# Altium PCB FPW1-0-2.PcbDoc (part 1 of 11)
Units mm, origin at the board's own origin, x right, y up, seen from the top; angles counter-clockwise.
Board outline 85 x 56 mm, 4 copper layers (Top Layer, GND_Plane, 3V3_Plane, Bottom Layer); 182 components, 321 nets, 1106 pads, 360 vias.
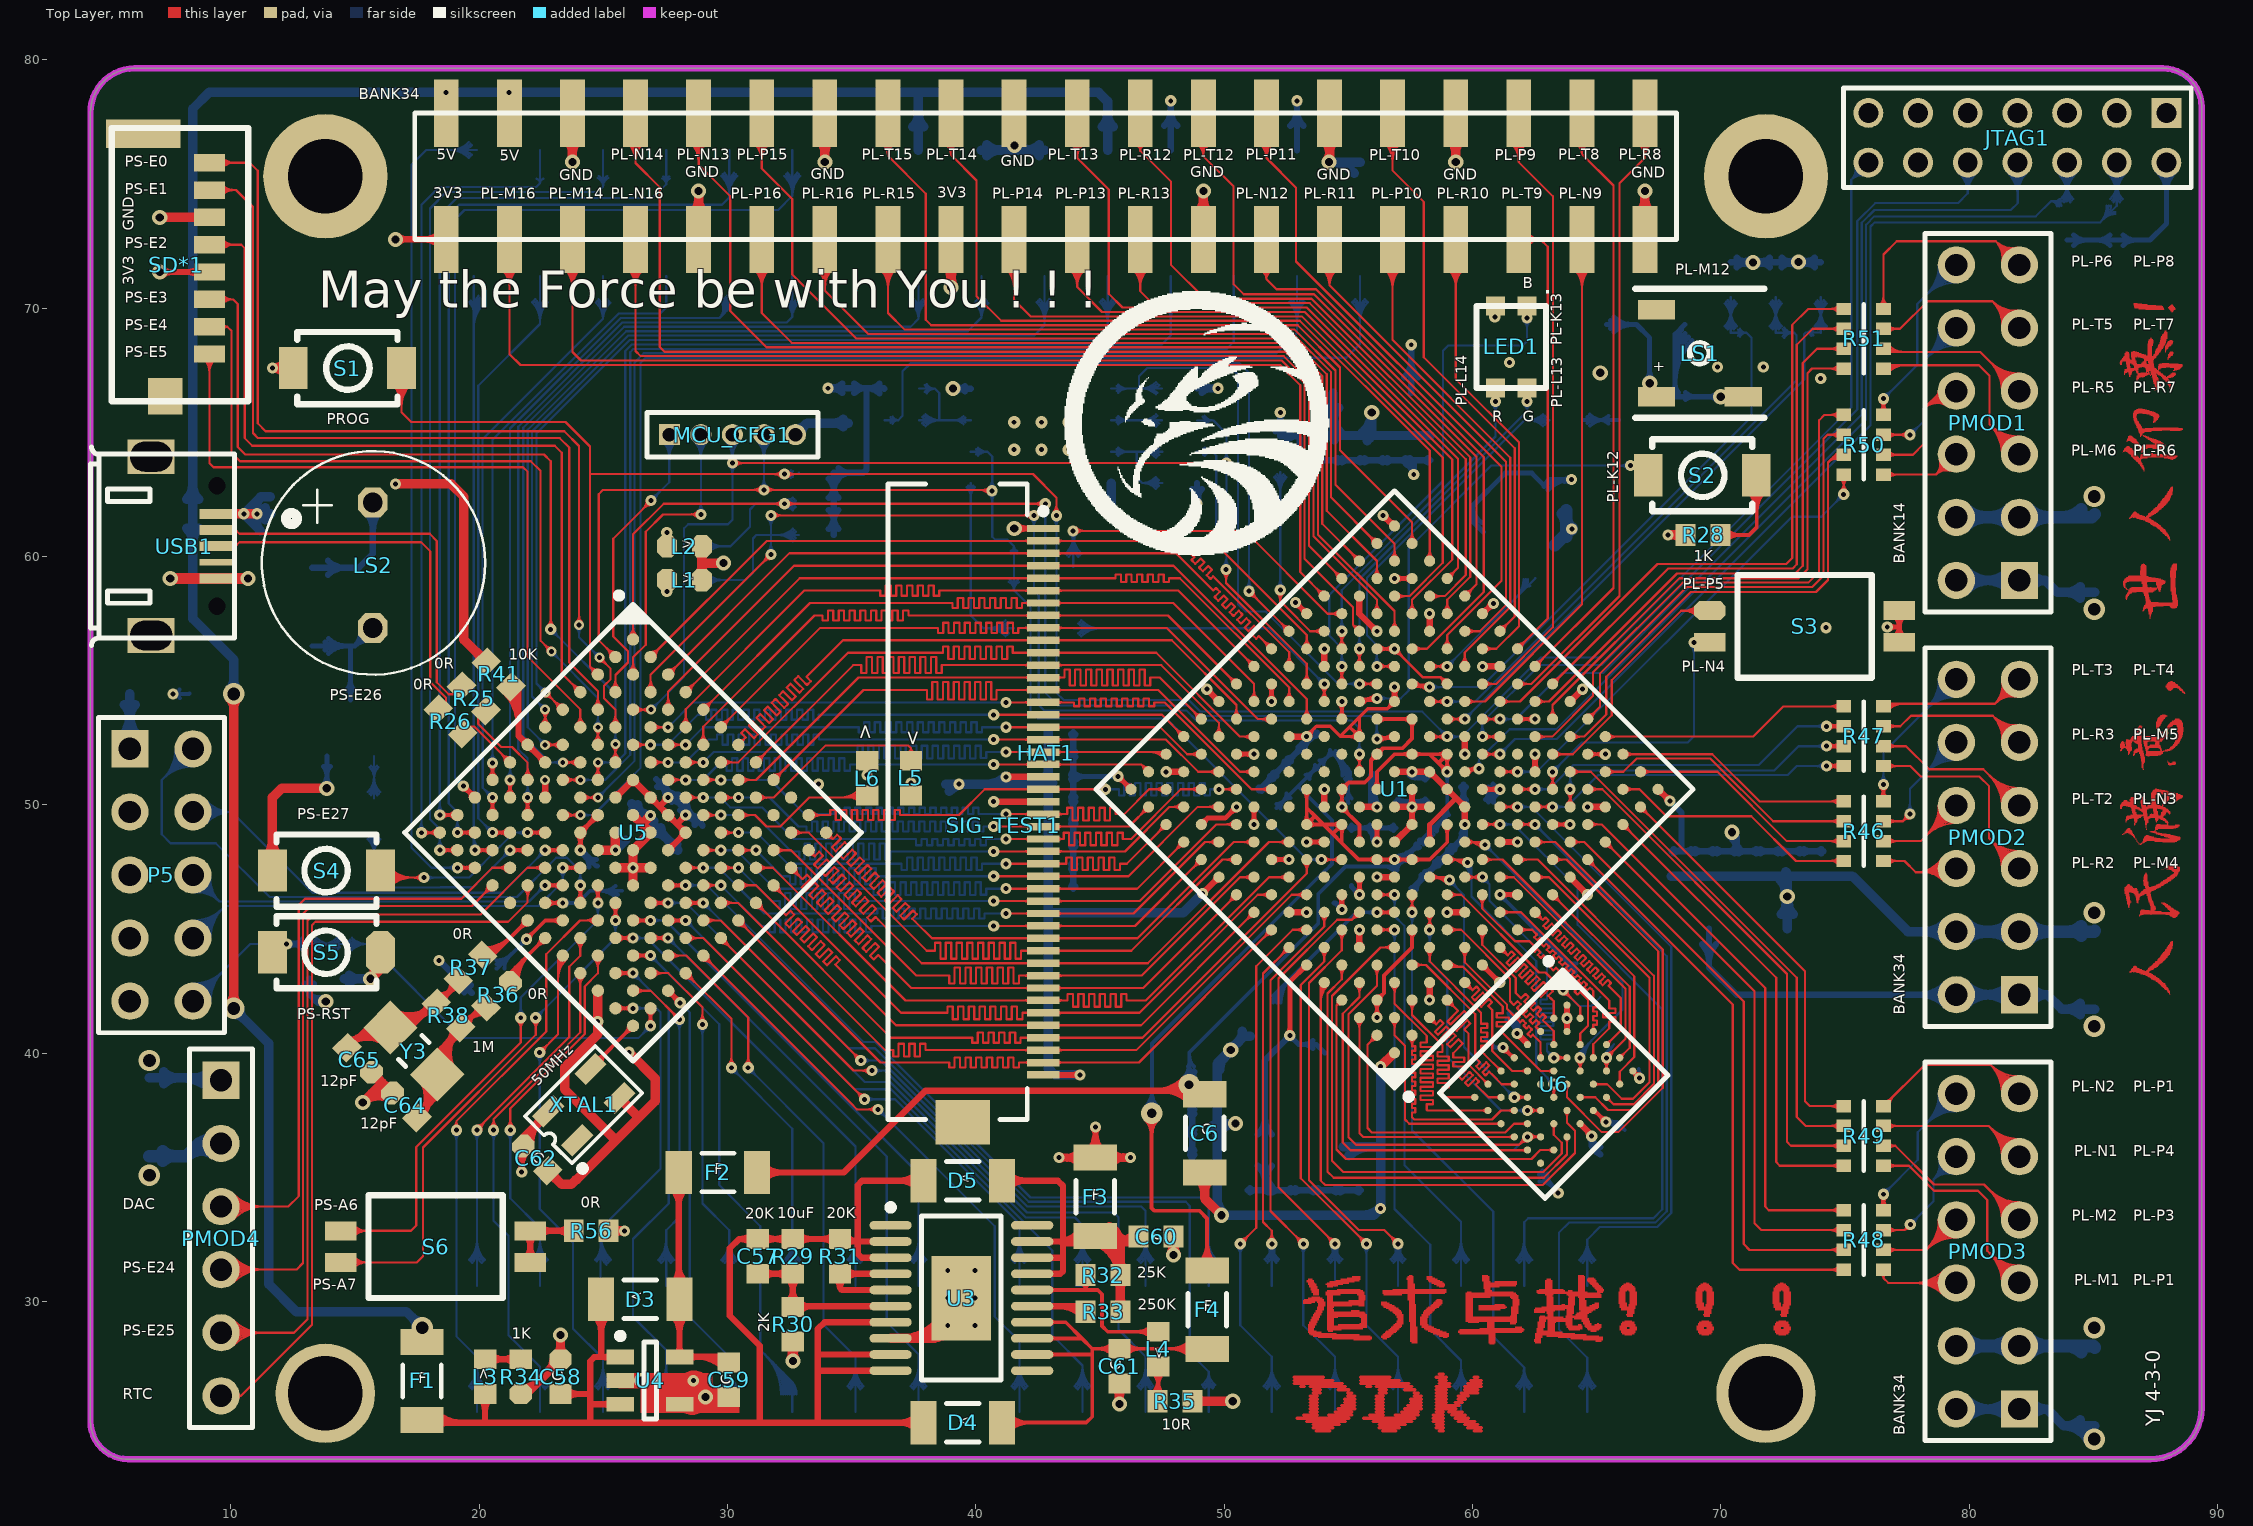
[diagram p0: Top Layer view]
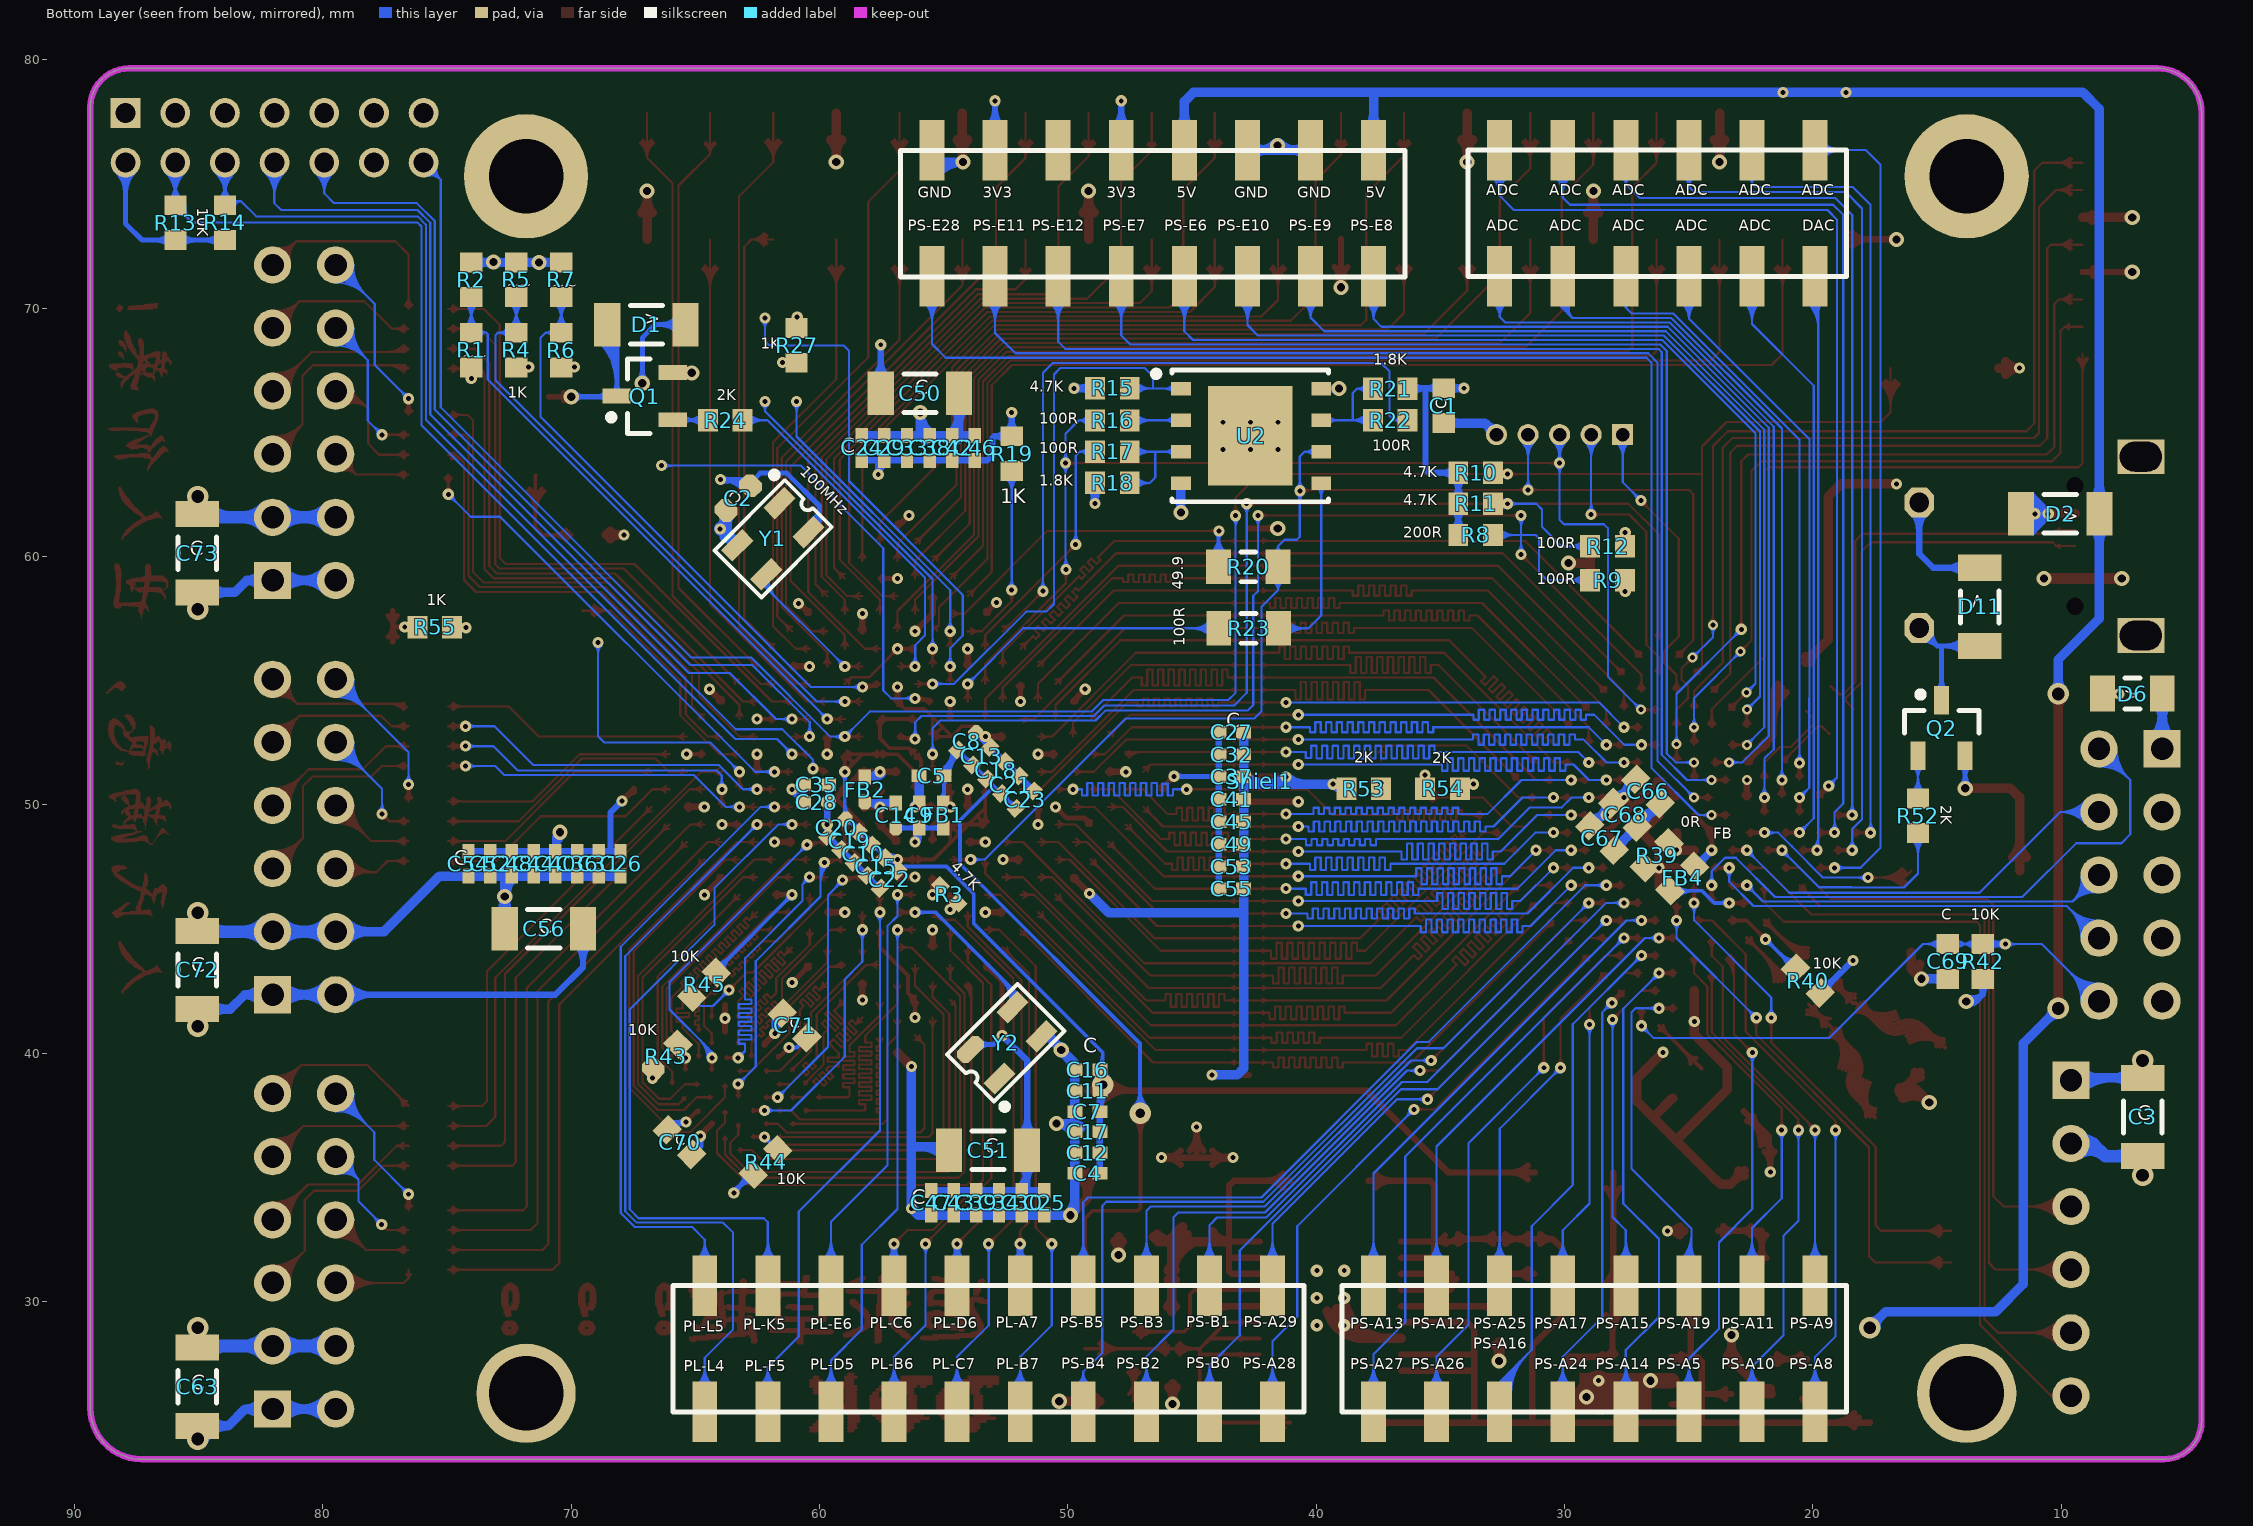
[diagram p1: Bottom Layer view, seen from below]
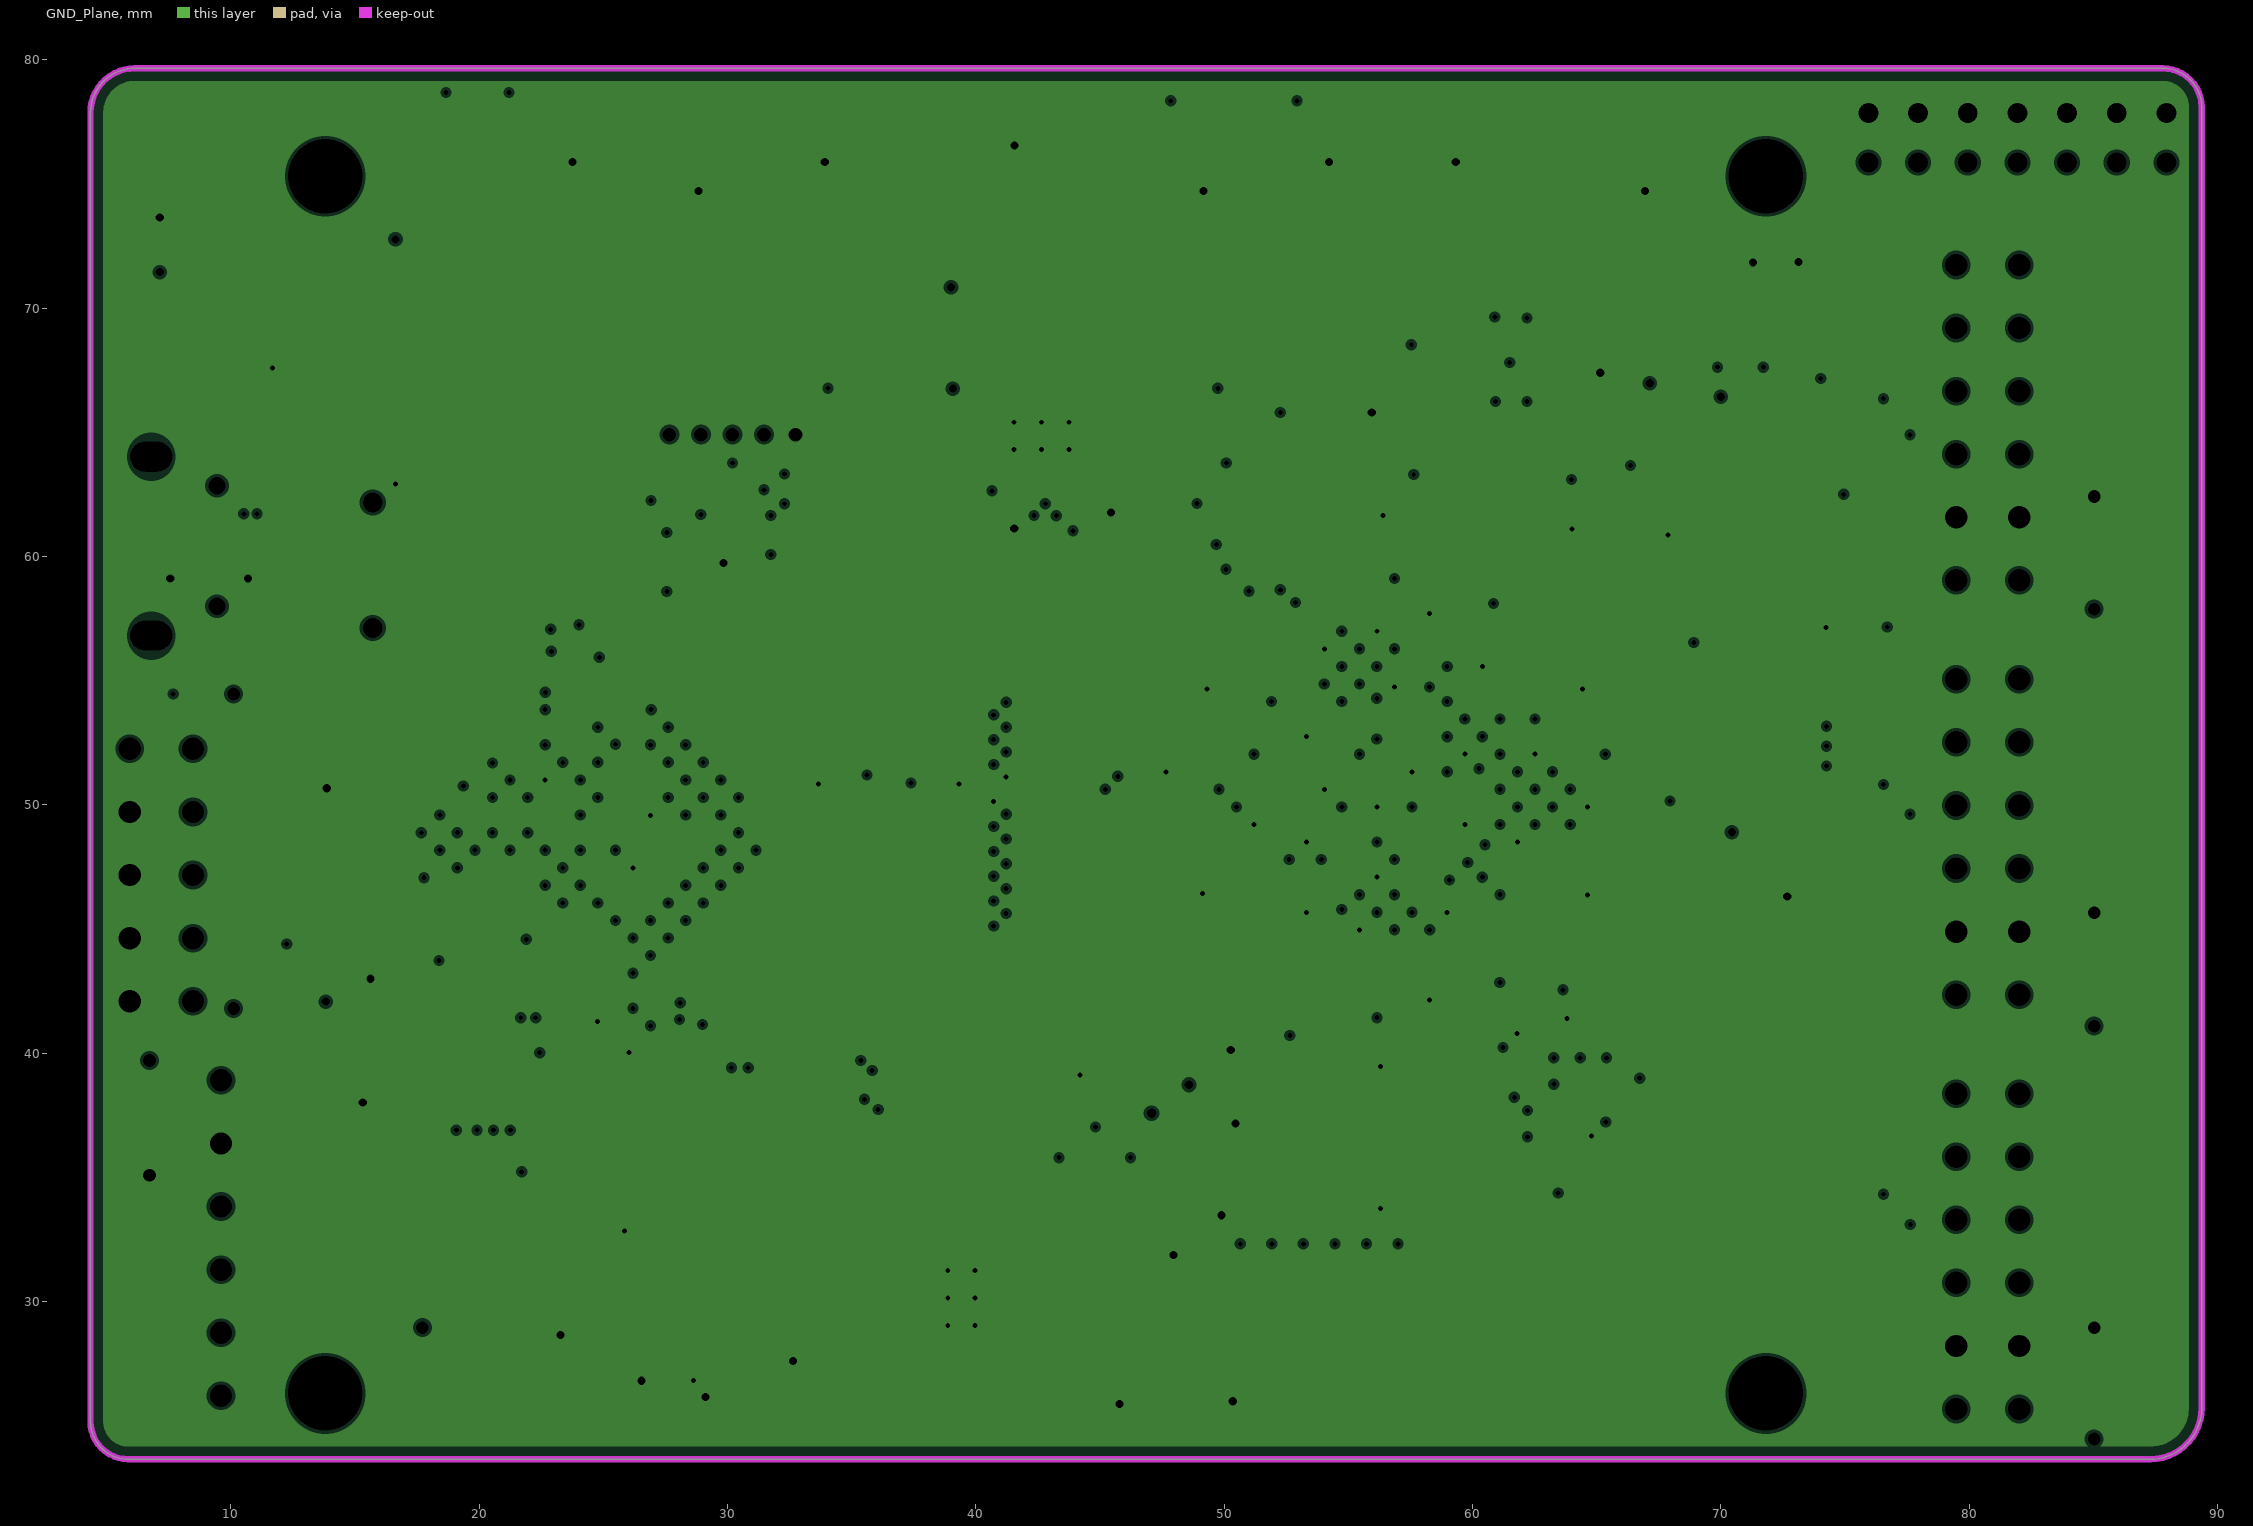
[diagram p2: GND_Plane, clearances drawn from the general rule]
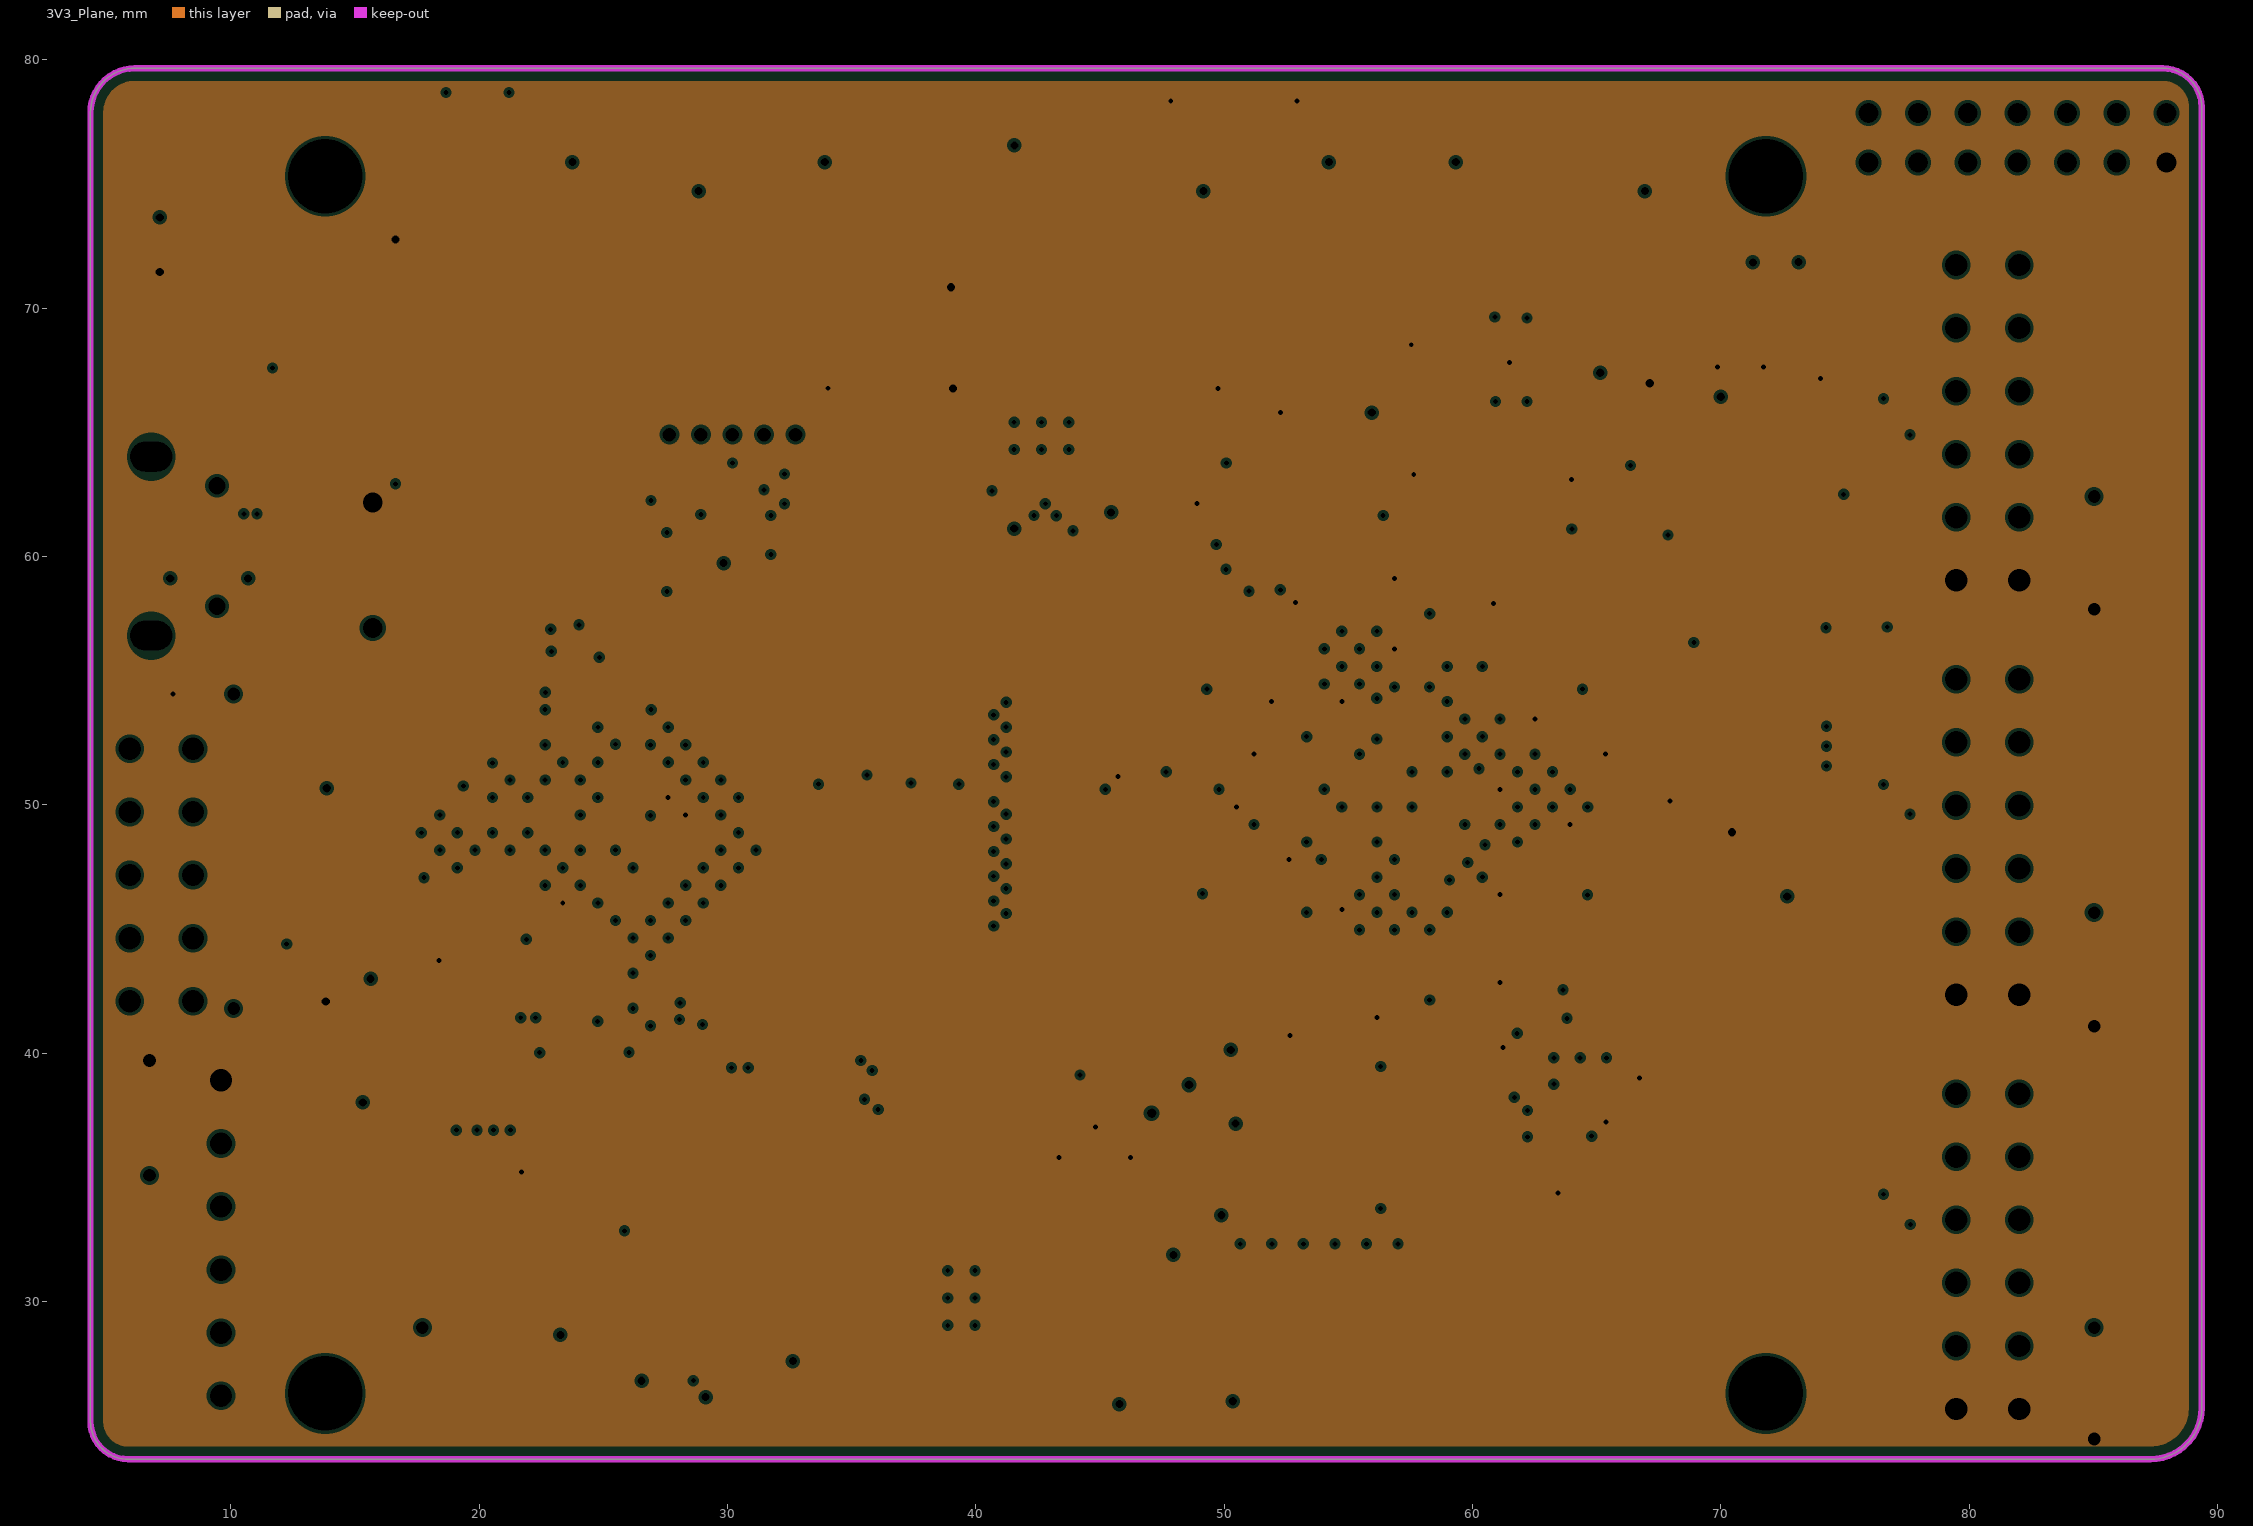
[diagram p3: 3V3_Plane, clearances drawn from the general rule]

## Layer stack, top to bottom
Top Layer: signal copper 0.0356
Dielectric: core 0.32, FR-4, Dk 4.8
GND_Plane: plane copper 0.0356, net GND
Dielectric: prepreg 0.32, FR-4, Dk 4.8
3V3_Plane: plane copper 0.0356, net 3V3
Dielectric: core 0.32, FR-4, Dk 4.8
Bottom Layer: signal copper 0.0356

## Board outline
4.356,25.184 ccw(c5.88,25.184) 5.88,23.66 87.287,23.66 ccw(c87.287,25.729) 89.356,25.729 89.356,78.093 ccw(c87.789,78.093) 87.789,79.66 6.14,79.66 ccw(c6.14,77.876) 4.356,77.876

## Design rules (kind name [scope] priority, off if disabled: settings)
Clearance VIA2ALL [(IsPad OR IsVia)] p1: gap=0.127
Clearance ALL2ALL [All] p2: gap=0.089
ComponentClearance [All] p1 off: gap=0.254 collisioncheckmode=3 verticalgap=0.254 showdistances=FALSE
DiffPairsRouting [All] p1: maxlimit=0.254 minlimit=0.254 mostfreqgap=0.254 maxuncoupledlength=12.7
PlaneClearance [All] p1: clearance=0.127
PlaneConnect [All] p1: planeconnectstyle=Direct reliefexpansion=0.508 reliefentries=4 reliefconductorwidth=0.254 reliefairgap=0.254
PolygonConnect [All] p1: connectstyle=Direct reliefconductorwidth=0.254 reliefentries=4 polygonreliefangle="90 Angle" airgapwidth=0.254
RoutingVias [All] p1: holewidth=0.711 width=1.27 viastyle="Through Hole" minholewidth=0.711 minwidth=1.27 maxholewidth=0.711 maxwidth=1.27
SolderMaskExpansion [All] p1: expansion=0.051
Width [All] p1: maxlimit=1.27 minlimit=0.089 preferedwidth=0.254 minimp=50.000000 maximp=50.000000 favimp=50.000000
24 further rules are at their usual default settings.

## Classes and differential pairs
net class PTE[5..0]: PTE0 PTE1 PTE2 PTE3 PTE4 PTE5 PTE6 PTE7 PTE8 PTE9 PTE10 PTE11 PTE12 PTE24 PTE25 PTE26 PTE27 PTE28
component class FPGA_CFG: JTAG1 L1 L2 MCU_CFG1 R1 R2 R3 R4 R5 R6 R7 R8 R9 R10 R11 R12 R13 R14 S1 U1
component class FPGA_IO: C1 C2 R15 R16 R17 R18 R19 R20 R21 R22 R23 U2 Y1 Y2
component class FPGA_Power: C4 C5 C6 C7 C8 C9 C10 C11 C12 C13 C14 C15 C16 C17 C18 C19 C20 C21 C22 C23 C24 C25 C26 C27 C28 C29 C30 C31 C32 C33 C34 C35 C36 C37 C38 C39 C40 C41 C42 C43 C44 C45 C46 C47 C48 C49 C50 C51 C52 C53 C54 C55 C56 FB1 FB2
component class IO: C3 C63 C72 C73 D1 D2 D11 F1 HAT1 L5 L6 LED1 LS1 LS2 PMOD1 PMOD2 PMOD3 PMOD4 Q1 Q2 R24 R25 R26 R27 R28 R46 R47 R48 R49 R50 R51 R52 R53 R54 R55 R56 S2 S3 S4 S6 SD*1 Shiel1 USB1
component class MCU: C62 C64 C65 C66 C67 C68 C69 D6 FB4 P5 R36 R37 R38 R39 R40 R41 R42 S5 SIG_TEST1 U5 XTAL1 Y3
component class MEMORY: C70 C71 R43 R44 R45 U6
component class Power: C57 C58 C59 C60 C61 D3 D4 D5 F2 F3 F4 L3 L4 R29 R30 R31 R32 R33 R34 R35 U3 U4
net class BANK14_IO[42..1]: BANK14_IO1 BANK14_IO2 BANK14_IO3 BANK14_IO4 BANK14_IO5 BANK14_IO6 BANK14_IO7 BANK14_IO8 BANK14_IO9 BANK14_IO10 BANK14_IO11 BANK14_IO12 BANK14_IO13 BANK14_IO14 BANK14_IO15 BANK14_IO16 BANK14_IO17 BANK14_IO18 BANK14_IO19 BANK14_IO20 BANK14_IO21 BANK14_IO22 BANK14_IO23 BANK14_IO24 BANK14_IO25 BANK14_IO26 BANK14_IO27 BANK14_IO28 BANK14_IO29 BANK14_IO30 BANK14_IO31 BANK14_IO32 BANK14_IO33 BANK14_IO34 BANK14_IO35 BANK14_IO36 BANK14_IO37 BANK14_IO38 BANK14_IO39 BANK14_IO40 BANK14_IO41 BANK14_IO42
net class BANK15_IO[9..1]: BANK15_IO1 BANK15_IO2 BANK15_IO3 BANK15_IO4 BANK15_IO5 BANK15_IO6 BANK15_IO7 BANK15_IO8 BANK15_IO9
net class FB_AD[31..0]: FB_AD0 FB_AD1 FB_AD2 FB_AD3 FB_AD4 FB_AD5 FB_AD6 FB_AD7 FB_AD8 FB_AD9 FB_AD10 FB_AD11 FB_AD12 FB_AD13 FB_AD14 FB_AD15 FB_AD16 FB_AD17 FB_AD18 FB_AD19 FB_AD20 FB_AD21 FB_AD22 FB_AD23 FB_AD24 FB_AD25 FB_AD26 FB_AD27 FB_AD28 FB_AD29 FB_AD30 FB_AD31
net class SRAM-A[19..0]: SRAM-A0 SRAM-A1 SRAM-A2 SRAM-A3 SRAM-A4 SRAM-A5 SRAM-A6 SRAM-A7 SRAM-A8 SRAM-A9 SRAM-A10 SRAM-A11 SRAM-A12 SRAM-A13 SRAM-A14 SRAM-A15 SRAM-A16 SRAM-A17 SRAM-A18 SRAM-A19
net class SRAM-DQ[15..0]: SRAM-DQ0 SRAM-DQ1 SRAM-DQ2 SRAM-DQ3 SRAM-DQ4 SRAM-DQ5 SRAM-DQ6 SRAM-DQ7 SRAM-DQ8 SRAM-DQ9 SRAM-DQ10 SRAM-DQ11 SRAM-DQ12 SRAM-DQ13 SRAM-DQ14 SRAM-DQ15
net class ANALOG[13..0]: ANALOG0 ANALOG1 ANALOG2 ANALOG3 ANALOG4 ANALOG5 ANALOG6 ANALOG7 ANALOG8 ANALOG9 ANALOG10 ANALOG11 ANALOG12 ANALOG13
differential pair USB0: +USB0_P -USB0_N
differential pair USB0D: +USB0D_P -USB0D_N

## Components (designator, comment, footprint, x,y, rotation, side; value= is the part's Value field where it differs from the comment)
C1 "Cap" 1608[0603]#1 34.861,66.078 r270 bottom
C2 "Cap" 1608[0603]#2 63.271,62.357 r135 bottom
C3 "Cap" 1206 6.718,37.44 r270 bottom
C4 "Cap" 0402#1 49.212,35.166 r0 bottom
C5 "Cap" 0402#1 55.486,51.181 r0 bottom
C6 "Cap" 1206 49.212,36.779 r270 top
C7 "Cap" 0402#1 49.212,37.655 r0 bottom
C8 "Cap" 0402#2 54.077,52.565 r135 bottom
C9 "Cap" 0402#1 55.982,49.581 r270 bottom
C10 "Cap" 0402#1 58.26,48.043 r315 bottom
C11 "Cap" 0402#1 49.212,38.501 r0 bottom
C12 "Cap" 0402#1 49.212,36.005 r0 bottom
C13 "Cap" 0402#1 53.48,51.968 r135 bottom
C14 "Cap" 0402#3 56.921,49.581 r90 bottom
C15 "Cap" 0402#1 57.729,47.522 r315 bottom
C16 "Cap" 0402#1 49.212,39.346 r0 bottom
C17 "Cap" 0402#1 49.212,36.843 r0 bottom
C18 "Cap" 0402#1 52.908,51.397 r135 bottom
C19 "Cap" 0402#1 58.791,48.564 r315 bottom
C20 "Cap" 0402#3 59.322,49.085 r315 bottom
C21 "Cap" 0402#1 52.324,50.813 r135 bottom
C22 "Cap" 0402#1 57.199,47.001 r315 bottom
C23 "Cap" 0402#1 51.74,50.216 r135 bottom
C24 "Cap" 0402#1 58.293,64.376 r90 bottom
C25 "Cap" 0402#1 50.952,33.985 r270 bottom
C26 "Cap" 0402#1 68.008,47.638 r270 bottom
C27 "Cap" 0402#1 43.421,52.934 r180 bottom
C28 "Cap" 0402#3 60.134,50.114 r0 bottom
C29 "Cap" 0402#1 57.384,64.376 r90 bottom
C30 "Cap" 0402#1 51.862,33.985 r270 bottom
C31 "Cap" 0402#1 68.883,47.638 r270 bottom
C32 "Cap" 0402#1 43.421,52.032 r180 bottom
C33 "Cap" 0402#1 56.474,64.376 r90 bottom
C34 "Cap" 0402#1 52.771,33.985 r270 bottom
C35 "Cap" 0402#1 60.134,50.813 r0 bottom
C36 "Cap" 0402#1 69.757,47.638 r270 bottom
C37 "Cap" 0402#1 43.421,51.13 r180 bottom
C38 "Cap" 0402#1 55.565,64.376 r90 bottom
C39 "Cap" 0402#1 53.68,33.985 r270 bottom
C40 "Cap" 0402#1 70.632,47.638 r270 bottom
C41 "Cap" 0402#1 43.421,50.228 r180 bottom
C42 "Cap" 0402#1 54.656,64.376 r90 bottom
C43 "Cap" 0402#1 54.59,33.985 r270 bottom
C44 "Cap" 0402#1 71.506,47.638 r270 bottom
C45 "Cap" 0402#1 43.421,49.327 r180 bottom
C46 "Cap" 0402#1 53.746,64.376 r90 bottom
C47 "Cap" 0402#1 55.499,33.985 r270 bottom
C48 "Cap" 0402#1 72.381,47.638 r270 bottom
C49 "Cap" 0402#1 43.421,48.425 r180 bottom
C50 "Cap" 1206 55.956,66.586 r180 bottom
C51 "Cap" 1206 53.213,36.106 r0 bottom
C52 "Cap" 0402#1 73.255,47.638 r270 bottom
C53 "Cap" 0402#1 43.421,47.523 r180 bottom
C54 "Cap" 0402#1 74.13,47.638 r270 bottom
C55 "Cap" 0402#1 43.421,46.622 r180 bottom
C56 "Cap" 1206 71.095,45.021 r0 bottom
C57 "Cap" 1608[0603]#1 31.217,31.826 r270 top
C58 "Cap" 1608[0603]#3 23.279,26.988 r270 top
C59 "Cap" 1608[0603]#1 30.048,26.86 r270 top
C60 "Cap" 1608[0603]#1 47.257,32.626 r0 top
C61 "Cap" 1608[0603]#1 45.783,27.407 r270 top
C62 "Cap" 1608[0603]#4 22.276,35.776 r135 top
C63 "Cap" 1206 85.052,26.581 r90 bottom
C64 "Cap" 1608[0603]#3 17.005,37.91 r315 top
C65 "Cap" 1608[0603]#3 15.176,39.738 r135 top
C66 "Cap" 1608[0603]#1 26.645,50.546 r45 bottom
C67 "Cap" 1608[0603]#1 28.499,48.666 r45 bottom
C68 "Cap" 1608[0603]#1 27.572,49.606 r45 bottom
C69 "Cap" 1608[0603]#1 14.58,43.701 r90 bottom
C70 "Cap" 1608[0603]#1 65.634,36.424 r45 bottom
C71 "Cap" 1608[0603]#1 60.998,41.123 r225 bottom
C72 "Cap" 1206 85.052,43.358 r90 bottom
C73 "Cap" 1206 85.052,60.134 r90 bottom
D1 "SK34" 1206 66.967,69.342 r180 bottom
D2 "SK34" 1206 10.046,61.722 r180 bottom
D3 "SK34" 1206 26.492,30.099 r180 top
D4 "SK34" 1206 39.472,25.133 r180 top
D5 "SK34" 1206 39.472,34.874 r180 top
D6 "SK34" C2012 7.137,54.483 r180 bottom
D11 "SK34" 1206 13.284,57.975 r90 bottom
F1 "Fuse 1" 1206 17.704,26.81 r90 top
F2 "Fuse 1" 1206 29.616,35.204 r180 top
F3 "Fuse 1" 1206 44.818,34.227 r270 top
F4 "Fuse 1" 1206 49.314,29.68 r270 top
FB1 "Inductor" 0402#1 55.016,49.581 r270 bottom
FB2 "Inductor" 0402#2 58.179,50.622 r270 bottom
FB4 "Inductor" 1608[0603]#1 25.26,47.041 r135 bottom
HAT1 "respberry-HAT" SMT-HAT 42.812,75.311 r0 top locked
JTAG1 "MHDR2X7" "Hearder2 7X2" 87.935,77.864 r270 top
L1 "LED" 1608[0603]#2 28.27,59.055 r0 top
L2 "LED" 1608[0603]#2 28.27,60.414 r0 top
L3 "LED" 1608[0603]#1 20.244,26.987 r90 top
L4 "LED" 1608[0603]#1 47.346,28.092 r270 top
L5 "LED" 1608[0603]#1 37.389,51.079 r270 top
L6 "LED" 1608[0603]#1 35.623,51.079 r90 top
LED1 "RGB_LED1206" RGB 61.557,68.44 r270 top
LS1 "Bell" "MLT-5020 BZ" 69.151,68.186 r0 top
LS2 "Bell" BZ 15.723,59.753 r0 top locked
MCU_CFG1 "Header 5" MHDR1X5 27.661,64.91 r0 top
P5 "JTAG" HDR2X5 5.944,52.261 r270 top
PMOD1 "Header 6X2" HDR2X6 82.017,59.042 r90 top
PMOD2 "Header 6X2" HDR2X6 82.017,42.361 r90 top
PMOD3 "Header 6X2" HDR2X6 82.017,25.679 r90 top
PMOD4 "Header 6" HDR1X6 9.614,38.913 r270 top
Q1 "QNPN" SOT23_N 67.031,66.459 r0 bottom
Q2 "QNPN" SOT23_N 14.821,53.099 r90 bottom
R1 "Res" 1608[0603]#1 74.016,68.313 r270 bottom
R2 "不贴" 1608[0603]#1 74.016,71.145 r270 bottom
R3 "Res" 0402#1 54.775,46.406 r45 bottom
R4 "不贴" 1608[0603]#1 72.206,68.313 r270 bottom
R5 "Res" 1608[0603]#1 72.206,71.145 r270 bottom
R6 "不贴" 1608[0603]#1 70.396,68.313 r270 bottom
R7 "Res" 1608[0603]#1 70.396,71.145 r270 bottom
R8 "Res" 1608[0603]#1 33.579,60.871 r0 bottom
R9 "Res" 1608[0603]#1 28.27,59.055 r0 bottom
R10 "Res" 1608[0603]#1 33.579,63.373 r0 bottom
R11 "Res" 1608[0603]#1 33.579,62.122 r0 bottom
R12 "Res" 1608[0603]#1 28.27,60.414 r0 bottom
R13 "Res" 1608[0603]#1 85.928,73.444 r270 bottom
R14 "Res" 1608[0603]#1 83.934,73.444 r270 bottom
R15 "Res" 1608[0603]#1 48.209,66.777 r180 bottom
R16 "Res" 1608[0603]#1 48.209,65.481 r0 bottom
R17 "Res" 1608[0603]#1 48.209,64.224 r0 bottom
R18 "Res" 1608[0603]#1 48.209,62.967 r180 bottom
R19 "Res" 1608[0603]#1 52.261,64.148 r270 bottom
R20 "Res" R2012 42.735,59.588 r0 bottom
R21 "Res" 1608[0603]#1 37.019,66.764 r0 bottom
R22 "Res" 1608[0603]#1 37.019,65.494 r0 bottom
R23 "Res" R2012 42.723,57.112 r180 bottom
R24 "Res2" 1608[0603]#1 63.792,65.494 r180 bottom
R25 "Res" 1608[0603]#1 19.787,54.292 r315 top
R26 "Res" 1608[0603]#1 18.847,53.365 r315 top
R27 "Res" 1608[0603]#1 60.922,68.504 r270 bottom
R28 "Res" 1608[0603]#1 69.278,60.871 r0 top
R29 "Res" 1608[0603]#1 32.635,31.826 r270 top
R30 "Res" 1608[0603]#1 32.635,29.096 r270 top
R31 "Res" 1608[0603]#1 34.531,31.826 r90 top
R32 "Res" 1608[0603]#1 45.119,31.077 r180 top
R33 "Res" 1608[0603]#1 45.123,29.604 r180 top
R34 "Res" 1608[0603]#3 21.679,26.987 r90 top
R35 "Res" 1608[0603]#1 48.019,25.997 r180 top
R36 "Res" 1608[0603]#4 20.777,42.367 r45 top
R37 "Res" 1608[0603]#1 19.66,43.459 r45 top
R38 "Res" 1608[0603]#1 18.771,41.529 r135 top
R39 "Res" 1608[0603]#1 26.289,47.981 r135 bottom
R40 "Res" 1608[0603]#1 20.206,42.926 r45 bottom
R41 "Res" 1608[0603]#1 20.79,55.258 r315 top
R42 "Res" 1608[0603]#1 13.157,43.701 r90 bottom
R43 "Res" 1608[0603]#4 66.192,39.878 r315 bottom
R44 "Res" 1608[0603]#1 62.166,35.623 r315 bottom
R45 "Res" 1608[0603]#1 64.643,42.761 r135 bottom
R46 "res*4" 0603*4 75.743,48.946 r90 top
R47 "res*4" 0603*4 75.743,52.768 r90 top
R48 "res*4" 0603*4 75.743,32.487 r90 top
R49 "res*4" 0603*4 75.743,36.678 r90 top
R50 "res*4" 0603*4 75.743,64.503 r90 top
R51 "res*4" 0603*4 75.743,68.77 r90 top
R52 "Res2" 1608[0603]#1 15.773,49.568 r270 bottom
R53 "Res" 1608[0603]#1 38.087,50.648 r180 bottom
R54 "Res" 1608[0603]#1 34.912,50.648 r0 bottom
R55 "Res" 1608[0603]#1 75.489,57.15 r0 bottom
R56 "Res" 1608[0603]#1 24.511,32.855 r180 top
S1 "SW-PB" "key 3*4*2"#1 14.719,67.589 r0 top
S2 "SW-PB" "key 3*4*2"#1 69.266,63.271 r0 top
S3 "SW DIP-2" sw*2#1 73.368,57.188 r0 top
S4 "SW-PB" "key 3*4*2"#1 13.843,47.358 r180 top
S5 "SW-PB" "key 3*4*2"#2 13.843,44.069 r180 top
S6 "SW DIP-2" sw*2#2 18.25,32.22 r0 top locked
SD*1 "TF_card" TF卡座(短体) 5.207,77.254 r270 top locked
Shiel1 "Arduino-Shield" SMT-B-Shield 39.726,28.105 r0 top locked
SIG_TEST1 "Header 24X2" FFC/SM0.5-2H45 41.096,50.131 r270 top locked
U1 "XC7A35T-1FTG256" BGA100P9X9-81A 56.858,50.63 r135 top locked
U2 "N25Q032A" QFN127P500X600X100_HS-9N 42.647,64.859 r180 bottom
U3 "TPS70151" TPS701 39.421,30.15 r0 top
U4 "TLV71210" TLV712 26.886,26.822 r0 top
U5 "MK64BGA144" BGA144C100P12X12_1300X1300X161 26.199,48.887 r315 top locked
U6 "EM7164SU16" BGA48C75P6X8_598X698X104 63.271,38.76 r315 top locked
USB1 "USB_5line" USB-MICRO-5P-2F 9.449,61.722 r90 top locked
XTAL1 "50M有源晶体" XTAL7_3225#1 24.219,37.935 r45 top
Y1 "100MHZ" XTAL7_3225#1 61.874,60.719 r315 bottom
Y2 "XMHZ" XTAL7_3225#2 52.489,40.424 r135 bottom
Y3 "32.768kHZ" 3215 17.374,40.094 r135 top

## Footprints (in the part's own frame and the unit in brackets; to place one, negate y for a bottom-side part, rotate by r counter-clockwise, add the part's x,y. Pads: shape width x height; smd on the part's side, far side on the other; paste and mask are expansions set on the pad)
0402#1 [mm] "Chip Capacitor, Body 1.0x0.5mm, IPC High Density"
  rect 0.6x0.5 smd: 1(-0.5,0) 2(0.5,0)
  body extent -0.55,-0.3 0.55,0.3, height 1.3
0402#2 [mm] "Chip Capacitor, Body 1.0x0.5mm, IPC High Density"
  rect 0.6x0.5 smd: 1(-0.5,0)
  oct 0.6x0.5 smd: 2(0.5,0)
  body extent -0.55,-0.3 0.55,0.3, height 1.3
0402#3 [mm] "Chip Capacitor, Body 1.0x0.5mm, IPC High Density"
  oct 0.6x0.5 smd: 1(-0.5,0)
  rect 0.6x0.5 smd: 2(0.5,0)
  body extent -0.55,-0.3 0.55,0.3, height 1.3
0603*4 [mm]
  rect 0.5x0.6 smd: 1(-1.2,-0.8) 2(-1.2,0.8) 3(-0.4,-0.8) 4(-0.4,0.8) 5(0.4,-0.8) 6(0.4,0.8) 7(1.2,-0.8) 8(1.2,0.8)
  silkscreen extent -1.4,0 1.4,0
1206 [mm]
  rect 1.05x1.75 smd: 1(-1.575,0) 2(1.575,0)
  silkscreen extent -0.65,-0.77 0.65,0.77, body extent -1.6,-0.8 1.6,0.8, height 1.6
1608[0603]#1 [mm] "Chip Capacitor, Body 1.6x0.8mm, IPC High Density"
  rect 0.8x0.9 smd: 1(-0.7,0) 2(0.7,0)
  body extent -0.87,-0.48 0.87,0.48, height 1.3
1608[0603]#2 [mm] "Chip Capacitor, Body 1.6x0.8mm, IPC High Density"
  oct 0.8x0.9 smd: 1(-0.7,0) 2(0.7,0)
  body extent -0.87,-0.47 0.87,0.47, height 1.3
1608[0603]#3 [mm] "Chip Capacitor, Body 1.6x0.8mm, IPC High Density"
  oct 0.8x0.9 smd: 1(-0.7,0)
  rect 0.8x0.9 smd: 2(0.7,0)
  body extent -0.87,-0.48 0.87,0.48, height 1.3
1608[0603]#4 [mm] "Chip Capacitor, Body 1.6x0.8mm, IPC High Density"
  rect 0.8x0.9 smd: 1(-0.7,0)
  oct 0.8x0.9 smd: 2(0.7,0)
  body extent -0.87,-0.47 0.87,0.47, height 1.3
3215 [mm]
  rect 1.54x1.55 smd: 1(-1.335,0) 2(1.335,0)
  silkscreen extent -0.2,-0.68 0.2,0.68, body extent -1.65,-0.75 1.65,0.75, height 0.75
BGA48C75P6X8_598X698X104 [mm] "BGA, 48-Leads, Body 5.98x6.98mmx1.04mm, Pitch 0.75mm"
  round 0.29 smd: A1(-1.875,2.625) A2(-1.125,2.625) A3(-0.375,2.625) A4(0.375,2.625) A5(1.125,2.625) A6(1.875,2.625) B1(-1.875,1.875) B2(-1.125,1.875) B3(-0.375,1.875) B4(0.375,1.875) B5(1.125,1.875) B6(1.875,1.875) C1(-1.875,1.125) C2(-1.125,1.125) C3(-0.375,1.125) C4(0.375,1.125) C5(1.125,1.125) C6(1.875,1.125) D1(-1.875,0.375) D2(-1.125,0.375) D3(-0.375,0.375) D4(0.375,0.375) D5(1.125,0.375) D6(1.875,0.375) E1(-1.875,-0.375) E2(-1.125,-0.375) E3(-0.375,-0.375) E4(0.375,-0.375) E5(1.125,-0.375) E6(1.875,-0.375) F1(-1.875,-1.125) F2(-1.125,-1.125) F3(-0.375,-1.125) F4(0.375,-1.125) F5(1.125,-1.125) F6(1.875,-1.125) G1(-1.875,-1.875) G2(-1.125,-1.875) G3(-0.375,-1.875) G4(0.375,-1.875) G5(1.125,-1.875) G6(1.875,-1.875) H1(-1.875,-2.625) H2(-1.125,-2.625) H3(-0.375,-2.625) H4(0.375,-2.625) H5(1.125,-2.625) H6(1.875,-2.625)
  silkscreen extent -3.77,-3.5 3,3.5, body extent -2.99,-3.49 2.99,3.49, height 1.04
BGA100P9X9-81A [mm] "XC7A35T-1FTG256"
  round 0.45 smd: A1(-7.5,7.5) A2(-6.5,7.5) A3(-5.5,7.5) A4(-4.5,7.5) A5(-3.5,7.5) A6(-2.5,7.5) A7(-1.5,7.5) A8(-0.5,7.5) A9(0.5,7.5) A10(1.5,7.5) A11(2.5,7.5) A12(3.5,7.5) A13(4.5,7.5) A14(5.5,7.5) A15(6.5,7.5) A16(7.5,7.5) B1(-7.5,6.5) B2(-6.5,6.5) B3(-5.5,6.5) B4(-4.5,6.5) B5(-3.5,6.5) B6(-2.5,6.5) B7(-1.5,6.5) B8(-0.5,6.5) B9(0.5,6.5) B10(1.5,6.5) B11(2.5,6.5) B12(3.5,6.5) B13(4.5,6.5) B14(5.5,6.5) B15(6.5,6.5) B16(7.5,6.5) C1(-7.5,5.5) C2(-6.5,5.5) C3(-5.5,5.5) C4(-4.5,5.5) C5(-3.5,5.5) C6(-2.5,5.5) C7(-1.5,5.5) C8(-0.5,5.5) C9(0.5,5.5) C10(1.5,5.5) C11(2.5,5.5) C12(3.5,5.5) C13(4.5,5.5) C14(5.5,5.5) C15(6.5,5.5) C16(7.5,5.5) D1(-7.5,4.5) D2(-6.5,4.5) D3(-5.5,4.5) D4(-4.5,4.5) D5(-3.5,4.5) D6(-2.5,4.5) D7(-1.5,4.5) D8(-0.5,4.5) D9(0.5,4.5) D10(1.5,4.5) D11(2.5,4.5) D12(3.5,4.5) D13(4.5,4.5) D14(5.5,4.5) D15(6.5,4.5) D16(7.5,4.5) E1(-7.5,3.5) E2(-6.5,3.5) E3(-5.5,3.5) E4(-4.5,3.5) E5(-3.5,3.5) E6(-2.5,3.5) E7(-1.5,3.5) E8(-0.5,3.5) E9(0.5,3.5) E10(1.5,3.5) E11(2.5,3.5) E12(3.5,3.5) E13(4.5,3.5) E14(5.5,3.5) E15(6.5,3.5) E16(7.5,3.5) F1(-7.5,2.5) F2(-6.5,2.5) F3(-5.5,2.5) F4(-4.5,2.5) F5(-3.5,2.5) F6(-2.5,2.5) F7(-1.5,2.5) F8(-0.5,2.5) F9(0.5,2.5) F10(1.5,2.5) F11(2.5,2.5) F12(3.5,2.5) F13(4.5,2.5) F14(5.5,2.5) F15(6.5,2.5) F16(7.5,2.5) G1(-7.5,1.5) G2(-6.5,1.5) G3(-5.5,1.5) G4(-4.5,1.5) G5(-3.5,1.5) G6(-2.5,1.5) G7(-1.5,1.5) G8(-0.5,1.5) G9(0.5,1.5) G10(1.5,1.5) G11(2.5,1.5) G12(3.5,1.5) G13(4.5,1.5) G14(5.5,1.5) G15(6.5,1.5) G16(7.5,1.5) H1(-7.5,0.5) H2(-6.5,0.5) H3(-5.5,0.5) H4(-4.5,0.5) H5(-3.5,0.5) H6(-2.5,0.5) H7(-1.5,0.5) H8(-0.5,0.5) H9(0.5,0.5) H10(1.5,0.5) H11(2.5,0.5) H12(3.5,0.5) H13(4.5,0.5) H14(5.5,0.5) H15(6.5,0.5) H16(7.5,0.5) J1(-7.5,-0.5) J2(-6.5,-0.5) J3(-5.5,-0.5) J4(-4.5,-0.5) J5(-3.5,-0.5) J6(-2.5,-0.5) J7(-1.5,-0.5) J8(-0.5,-0.5) J9(0.5,-0.5) J10(1.5,-0.5) J11(2.5,-0.5) J12(3.5,-0.5) J13(4.5,-0.5) J14(5.5,-0.5) J15(6.5,-0.5) J16(7.5,-0.5) K1(-7.5,-1.5) K2(-6.5,-1.5) K3(-5.5,-1.5) K4(-4.5,-1.5) K5(-3.5,-1.5) K6(-2.5,-1.5) K7(-1.5,-1.5) K8(-0.5,-1.5) K9(0.5,-1.5) K10(1.5,-1.5) K11(2.5,-1.5) K12(3.5,-1.5) K13(4.5,-1.5) K14(5.5,-1.5) K15(6.5,-1.5) K16(7.5,-1.5) L1(-7.5,-2.5) L2(-6.5,-2.5) L3(-5.5,-2.5) L4(-4.5,-2.5) L5(-3.5,-2.5) L6(-2.5,-2.5) L7(-1.5,-2.5) L8(-0.5,-2.5) L9(0.5,-2.5) L10(1.5,-2.5) L11(2.5,-2.5) L12(3.5,-2.5) L13(4.5,-2.5) L14(5.5,-2.5) L15(6.5,-2.5) L16(7.5,-2.5) M1(-7.5,-3.5) M2(-6.5,-3.5) M3(-5.5,-3.5) M4(-4.5,-3.5) M5(-3.5,-3.5) M6(-2.5,-3.5) M7(-1.5,-3.5) M8(-0.5,-3.5) M9(0.5,-3.5) M10(1.5,-3.5) M11(2.5,-3.5) M12(3.5,-3.5) M13(4.5,-3.5) M14(5.5,-3.5) M15(6.5,-3.5) M16(7.5,-3.5) N1(-7.5,-4.5) N2(-6.5,-4.5) N3(-5.5,-4.5) N4(-4.5,-4.5) N5(-3.5,-4.5) N6(-2.5,-4.5) N7(-1.5,-4.5) N8(-0.5,-4.5) N9(0.5,-4.5) N10(1.5,-4.5) N11(2.5,-4.5) N12(3.5,-4.5) N13(4.5,-4.5) N14(5.5,-4.5) N15(6.5,-4.5) N16(7.5,-4.5) P1(-7.5,-5.5) P2(-6.5,-5.5) P3(-5.5,-5.5) P4(-4.5,-5.5) P5(-3.5,-5.5) P6(-2.5,-5.5) P7(-1.5,-5.5) P8(-0.5,-5.5) P9(0.5,-5.5) P10(1.5,-5.5) P11(2.5,-5.5) P12(3.5,-5.5) P13(4.5,-5.5) P14(5.5,-5.5) P15(6.5,-5.5) P16(7.5,-5.5) R1(-7.5,-6.5) R2(-6.5,-6.5) R3(-5.5,-6.5) R4(-4.5,-6.5) R5(-3.5,-6.5) R6(-2.5,-6.5) R7(-1.5,-6.5) R8(-0.5,-6.5) R9(0.5,-6.5) R10(1.5,-6.5) R11(2.5,-6.5) R12(3.5,-6.5) R13(4.5,-6.5) R14(5.5,-6.5) R15(6.5,-6.5) R16(7.5,-6.5) T1(-7.5,-7.5) T2(-6.5,-7.5) T3(-5.5,-7.5) T4(-4.5,-7.5) T5(-3.5,-7.5) T6(-2.5,-7.5) T7(-1.5,-7.5) T8(-0.5,-7.5) T9(0.5,-7.5) T10(1.5,-7.5) T11(2.5,-7.5) T12(3.5,-7.5) T13(4.5,-7.5) T14(5.5,-7.5) T15(6.5,-7.5) T16(7.5,-7.5)
  silkscreen extent -9.27,-8.5 8.5,8.5, body extent -8.5,-8.5 8.5,8.5, height 1.55
BGA144C100P12X12_1300X1300X161 [mm] "BGA, 144-Leads, Body 13.00x13.00mmx1.61mm, Pitch 1.00mm"
  round 0.5 smd: A1(-5.5,5.5) A2(-4.5,5.5) A3(-3.5,5.5) A4(-2.5,5.5) A5(-1.5,5.5) A6(-0.5,5.5) A7(0.5,5.5) A8(1.5,5.5) A9(2.5,5.5) A10(3.5,5.5) A11(4.5,5.5) A12(5.5,5.5) B1(-5.5,4.5) B2(-4.5,4.5) B3(-3.5,4.5) B4(-2.5,4.5) B5(-1.5,4.5) B6(-0.5,4.5) B7(0.5,4.5) B8(1.5,4.5) B9(2.5,4.5) B10(3.5,4.5) B11(4.5,4.5) B12(5.5,4.5) C1(-5.5,3.5) C2(-4.5,3.5) C3(-3.5,3.5) C4(-2.5,3.5) C5(-1.5,3.5) C6(-0.5,3.5) C7(0.5,3.5) C8(1.5,3.5) C9(2.5,3.5) C10(3.5,3.5) C11(4.5,3.5) C12(5.5,3.5) D1(-5.5,2.5) D2(-4.5,2.5) D3(-3.5,2.5) D4(-2.5,2.5) D5(-1.5,2.5) D6(-0.5,2.5) D7(0.5,2.5) D8(1.5,2.5) D9(2.5,2.5) D10(3.5,2.5) D11(4.5,2.5) D12(5.5,2.5) E1(-5.5,1.5) E2(-4.5,1.5) E3(-3.5,1.5) E4(-2.5,1.5) E5(-1.5,1.5) E6(-0.5,1.5) E7(0.5,1.5) E8(1.5,1.5) E9(2.5,1.5) E10(3.5,1.5) E11(4.5,1.5) E12(5.5,1.5) F1(-5.5,0.5) F2(-4.5,0.5) F3(-3.5,0.5) F4(-2.5,0.5) F5(-1.5,0.5) F6(-0.5,0.5) F7(0.5,0.5) F8(1.5,0.5) F9(2.5,0.5) F10(3.5,0.5) F11(4.5,0.5) F12(5.5,0.5) G1(-5.5,-0.5) G2(-4.5,-0.5) G3(-3.5,-0.5) G4(-2.5,-0.5) G5(-1.5,-0.5) G6(-0.5,-0.5) G7(0.5,-0.5) G8(1.5,-0.5) G9(2.5,-0.5) G10(3.5,-0.5) G11(4.5,-0.5) G12(5.5,-0.5) H1(-5.5,-1.5) H2(-4.5,-1.5) H3(-3.5,-1.5) H4(-2.5,-1.5) H5(-1.5,-1.5) H6(-0.5,-1.5) H7(0.5,-1.5) H8(1.5,-1.5) H9(2.5,-1.5) H10(3.5,-1.5) H11(4.5,-1.5) H12(5.5,-1.5) J1(-5.5,-2.5) J2(-4.5,-2.5) J3(-3.5,-2.5) J4(-2.5,-2.5) J5(-1.5,-2.5) J6(-0.5,-2.5) J7(0.5,-2.5) J8(1.5,-2.5) J9(2.5,-2.5) J10(3.5,-2.5) J11(4.5,-2.5) J12(5.5,-2.5) K1(-5.5,-3.5) K2(-4.5,-3.5) K3(-3.5,-3.5) K4(-2.5,-3.5) K5(-1.5,-3.5) K6(-0.5,-3.5) K7(0.5,-3.5) K8(1.5,-3.5) K9(2.5,-3.5) K10(3.5,-3.5) K11(4.5,-3.5) K12(5.5,-3.5) L1(-5.5,-4.5) L2(-4.5,-4.5) L3(-3.5,-4.5) L4(-2.5,-4.5) L5(-1.5,-4.5) L6(-0.5,-4.5) L7(0.5,-4.5) L8(1.5,-4.5) L9(2.5,-4.5) L10(3.5,-4.5) L11(4.5,-4.5) L12(5.5,-4.5) M1(-5.5,-5.5) M2(-4.5,-5.5) M3(-3.5,-5.5) M4(-2.5,-5.5) M5(-1.5,-5.5) M6(-0.5,-5.5) M7(0.5,-5.5) M8(1.5,-5.5) M9(2.5,-5.5) M10(3.5,-5.5) M11(4.5,-5.5) M12(5.5,-5.5)
  silkscreen extent -7.27,-6.5 6.5,6.5, body extent -6.5,-6.5 6.5,6.5, height 1.61
BZ [mm]
  oct 1.2x1.2 hole 0.8: 1(0,2.426) 2(0,-2.629)
  silkscreen extent -4.47,-4.51 4.53,4.49
C2012 [mm] "Chip Capacitor, 2-Leads, Body 2.0x1.2mm, IPC Low Density"
  rect 1x1.45 smd: 1(-1.2,0) 2(1.2,0)
  silkscreen extent -0.3,-0.63 0.3,0.63, body extent -0.98,-0.6 1.02,0.6, height 0.5
FFC/SM0.5-2H45 [mm] "Connector; FH12 Series; 45 Position; 0.5mm Spaced Bottom Contact"
  rect 0.3x1.3 smd: 1(-11,1.625) 2(-10.5,1.625) 3(-10,1.625) 4(-9.5,1.625) 5(-9,1.625) 6(-8.5,1.625) 7(-8,1.625) 8(-7.5,1.625) 9(-7,1.625) 10(-6.5,1.625) 11(-6,1.625) 12(-5.5,1.625) 13(-5,1.625) 14(-4.5,1.625) 15(-4,1.625) 16(-3.5,1.625) 17(-3,1.625) 18(-2.5,1.625) 19(-2,1.625) 20(-1.5,1.625) 21(-1,1.625) 22(-0.5,1.625) 23(0,1.625) 24(0.5,1.625) 25(1,1.625) 26(1.5,1.625) 27(2,1.625) 28(2.5,1.625) 29(3,1.625) 30(3.5,1.625) 31(4,1.625) 32(4.5,1.625) 33(5,1.625) 34(5.5,1.625) 35(6,1.625) 36(6.5,1.625) 37(7,1.625) 38(7.5,1.625) 39(8,1.625) 40(8.5,1.625) 41(9,1.625) 42(9.5,1.625) 43(10,1.625) 44(10.5,1.625) 45(11,1.625)
  rect 1.8x2.2 smd: 47(12.9,-1.625)
  silkscreen extent -12.8,-4.62 12.8,1.75, body extent -12.8,-4.62 12.8,0.97, height 2
HDR1X6 [mm] "Connector; Header; 6 Position"
  rect 1.5x1.5 hole 0.9: 1(0,0)
  round 1.5 hole 0.9: 2(2.54,0) 3(5.08,0) 4(7.62,0) 5(10.16,0) 6(12.7,0)
  silkscreen extent -1.27,-1.27 13.97,1.27, body extent -1.27,-1.27 13.97,1.27, height 7.58
HDR2X5 [mm] "Connector; Header; 5x2 Position"
  rect 1.5x1.5 hole 0.9: 1(0,0)
  round 1.5 hole 0.9: 2(0,2.54) 3(2.54,0) 4(2.54,2.54) 5(5.08,0) 6(5.08,2.54) 7(7.62,0) 8(7.62,2.54) 9(10.16,0) 10(10.16,2.54)
  silkscreen extent -1.27,-1.27 11.43,3.81
HDR2X6 [mm] "Connector; Header; 6x2 Position"
  rect 1.5x1.5 hole 0.9: 1(0,0)
  round 1.5 hole 0.9: 2(0,2.54) 3(2.54,0) 4(2.54,2.54) 5(5.08,0) 6(5.08,2.54) 7(7.62,0) 8(7.62,2.54) 9(10.16,0) 10(10.16,2.54) 11(12.7,0) 12(12.7,2.54)
  silkscreen extent -1.27,-1.27 13.97,3.81, body extent -1.27,-1.27 13.97,3.81, height 7.58
"Hearder2 7X2" [mm]
  rect 1.2x1.2 hole 0.8: 1(0,0)
  round 1.2 hole 0.8: 2(2,0) 3(0,-2) 4(2,-2) 5(0,-4) 6(2,-4) 7(0,-6) 8(2,-6) 9(0,-8) 10(2,-8) 11(0,-10) 12(2,-10) 13(0,-12) 14(2,-12)
  silkscreen extent -1,-13 3,1
"key 3*4*2"#1 [mm]
  rect 1.15x1.7 smd: 1(-2.191,0) 2(2.159,0)
  silkscreen extent -2.03,-1.45 2,1.45
"key 3*4*2"#2 [mm]
  oct 1.15x1.7 smd: 1(-2.191,0)
  rect 1.15x1.7 smd: 2(2.159,0)
  silkscreen extent -2.03,-1.45 2,1.45
MHDR1X5 [mm] "Connector; Header; 5 Position"
  rect 0.85x0.85 hole 0.55: 1(0,0)
  round 0.85 hole 0.55: 2(1.27,0) 3(2.54,0) 4(3.81,0) 5(5.08,0)
  silkscreen extent -0.9,-0.9 5.98,0.9
"MLT-5020 BZ" [mm]
  rect 1.5x0.8 smd: 0(-1.75,1.75) 1(-1.75,-1.75) 2(1.75,-1.75)
  silkscreen extent -2.6,-2.6 2.6,2.6
QFN127P500X600X100_HS-9N [mm] "QFN, 8-Leads, Body 5.00x6.00mm, Pitch 1.27mm, Thermal Pad 4.00x3.40mm, IPC Medium Density"
  rect 0.8x0.55 smd: 1(-2.8,1.905) 2(-2.8,0.635) 3(-2.8,-0.635) 4(-2.8,-1.905) 5(2.85,-1.905) 6(2.85,-0.635) 7(2.85,0.635) 8(2.85,1.905)
  rect 3.4x4 smd paste+0 mask+0: 9(0,0)
  silkscreen extent -3.93,-2.65 3.15,2.65, body extent -3,-2.5 3,2.5, height 1
R2012 [mm] "Chip Resistor, 2-Leads, Body 2.0x1.2mm, IPC Low Density"
  rect 1x1.4 smd: 1(-1.2,0) 2(1.2,0)
  silkscreen extent -0.3,-0.6 0.3,0.6, body extent -0.98,-0.6 1.02,0.6, height 0.5
RGB [mil]
  rect 30x30 smd: 1(-65,25) 2(-65,-25) 3(65,-25) 4(65,25)
  silkscreen extent -90,-55 65,60
SMT-B-Shield [mm]
  rect 1x2.43 smd far side: 1(-19.812,43.18) 2(-19.812,48.26) 3(-17.272,43.18) 4(-17.272,48.26) 5(-14.732,43.18) 6(-14.732,48.26) 7(-12.192,43.18) 8(-12.192,48.26) 9(-9.652,43.18) 10(-9.652,48.26) 11(-7.112,43.18) 12(-7.112,48.26) 13(-2.037,43.18) 14(-2.037,48.26) 15(0.503,43.18) 16(0.503,48.26) 17(3.043,43.18) 18(3.043,48.26) 19(5.583,43.18) 20(5.583,48.26) 21(8.123,43.18) 22(8.123,48.26) 23(10.663,43.18) 24(10.663,48.26) 25(13.203,43.18) 26(13.203,48.26) 27(15.743,43.18) 28(15.743,48.26) 29(-19.812,-2.54) 30(-19.812,2.54) 31(-17.272,-2.54) 32(-17.272,2.54) 33(-14.732,-2.54) 34(-14.732,2.54) 35(-12.192,-2.54) 36(-12.192,2.54) 37(-9.652,-2.54) 38(-9.652,2.54) 39(-7.112,-2.54) 40(-7.112,2.54) 41(-4.572,-2.54) 42(-4.572,2.54) 43(-2.032,-2.54) 44(-2.032,2.54) 45(2.032,-2.54) 46(2.032,2.54) 47(4.572,-2.54) 48(4.572,2.54) 49(7.112,-2.54) 50(7.112,2.54) 51(9.652,-2.54) 52(9.652,2.54) 53(12.192,-2.54) 54(12.192,2.54) 55(14.732,-2.54) 56(14.732,2.54) 57(17.272,-2.54) 58(17.272,2.54) 59(19.812,-2.54) 60(19.812,2.54) 61(22.352,-2.54) 62(22.352,2.54) 63(24.892,-2.54) 64(24.892,2.54)
SMT-HAT [mm]
  round 4 hole 3: 0(-29,-49) 0(29,-49)
  round 5 hole 3: 0(-29,0) 0(29,0)
  rect 1x2.7 smd: 1(-24.13,-2.54) 2(-24.13,2.54) 3(-21.59,-2.54) 4(-21.59,2.54) 5(-19.05,-2.54) 6(-19.05,2.54) 7(-16.51,-2.54) 8(-16.51,2.54) 9(-13.97,-2.54) 10(-13.97,2.54) 11(-11.43,-2.54) 12(-11.43,2.54) 13(-8.89,-2.54) 14(-8.89,2.54) 15(-6.35,-2.54) 16(-6.35,2.54) 17(-3.81,-2.54) 18(-3.81,2.54) 19(-1.27,-2.54) 20(-1.27,2.54) 21(1.27,-2.54) 22(1.27,2.54) 23(3.81,-2.54) 24(3.81,2.54) 25(6.35,-2.54) 26(6.35,2.54) 27(8.89,-2.54) 28(8.89,2.54) 29(11.43,-2.54) 30(11.43,2.54) 31(13.97,-2.54) 32(13.97,2.54) 33(16.51,-2.54) 34(16.51,2.54) 35(19.05,-2.54) 36(19.05,2.54) 37(21.59,-2.54) 38(21.59,2.54) 39(24.13,-2.54) 40(24.13,2.54)
  silkscreen extent -25.4,-2.54 25.4,2.54, body extent -25.4,-2.54 25.4,2.54, height 7.58
SOT23_N [mm] "SOT23, 3-Leads, Body 2.9x1.3mm, Pitch 0.95mm, Lead Span 2.3mm - Reverse Pinning, IPC Medium Density"
  rect 1.15x0.6 smd: 1(1.125,0) 2(-1.125,-0.95) 3(-1.125,0.95)
  silkscreen extent -0.2,-1.5 1.48,1.5, body extent -0.7,-1.5 0.7,1.5, height 1.1
sw*2#1 [mm]
  oct 1.27x0.76 smd: 1(-3.81,0.635)
  rect 1.27x0.76 smd: 2(-3.81,-0.635) 3(3.81,-0.635) 4(3.81,0.635)
  silkscreen extent -2.7,-2.07 2.7,2.07
sw*2#2 [mm]
  rect 1.27x0.76 smd: 1(-3.81,0.635) 2(-3.81,-0.635) 3(3.81,-0.635) 4(3.81,0.635)
  silkscreen extent -2.7,-2.07 2.7,2.07
TF卡座(短体) [mm]
  rect 1.15x3 smd: 0(0.227,1.27)
  rect 1.48x1.4 smd: 0(10.795,2.159)
  rect 0.7x1.25 smd: 1(9.097,3.937) 2(7.997,3.937) 3(6.897,3.937) 4(5.797,3.937) 5(4.697,3.937) 6(3.597,3.937) 7(2.497,3.937) 8(1.397,3.937)
  silkscreen extent 0,0 11,5.5
TLV712 [mm] "SOT23, 5-Leads, Body 2.90x2.80mm, Pitch 0.95mm, IPC Medium Density"
  rect 1.1x0.6 smd: 1(-1.2,0.95) 2(-1.2,0) 3(-1.2,-0.95) 4(1.2,-0.95) 5(1.2,0.95)
  silkscreen extent -1.32,-1.55 0.25,1.92, body extent -0.87,-1.52 0.87,1.53, height 1.45
TPS701 [mm] "TSOP, 20-Leads, Body 6.50x4.40mm, Pitch 0.65mm, Thermal Pad 3.40.2x2.40.2mm, IPC Medium Density"
  oval 1.7x0.35 smd: 1(-2.85,2.925) 2(-2.85,2.275) 3(-2.85,1.625) 4(-2.85,0.975) 5(-2.85,0.325) 6(-2.85,-0.325) 7(-2.85,-0.975) 8(-2.85,-1.625) 9(-2.85,-2.275) 10(-2.85,-2.925) 11(2.85,-2.925) 12(2.85,-2.275) 13(2.85,-1.625) 14(2.85,-0.975) 15(2.85,-0.325) 16(2.85,0.325) 17(2.85,0.975) 18(2.85,1.625) 19(2.85,2.275) 20(2.85,2.925)
  rect 2.4x3.4 smd: 21(0,0)
  silkscreen extent -2.97,-3.3 1.6,3.77, body extent -2.25,-3.3 2.25,3.3, height 1.2
USB-MICRO-5P-2F [mm]
  round 0 hole 0.7: 0(-3.725,0) 0(1.125,0)
  rect 0.4x1.4 smd: 1(0,0) 2(-0.65,0) 3(-1.3,0) 5(-2.6,0)
  rect 0.254x1.4 smd: 4(-1.95,0)
  rect 1.4x1.9 hole 1.2 slot 1.7 at 90 deg: 6(2.3,2.65) 7(-4.9,2.65)
  silkscreen extent -5.3,-0.7 2.7,5.1
XTAL7_3225#1 [mil]
  rect 47.2x25.6 smd: 1(-47.25,-32.5) 2(47.25,-32.5) 3(47.25,32.5) 4(-47.25,32.5)
  silkscreen extent -79,-75 79,53
XTAL7_3225#2 [mil]
  rect 47.2x25.6 smd: 1(-47.25,-32.5) 2(47.25,-32.5) 3(47.25,32.5)
  oct 47.2x25.6 smd: 4(-47.25,32.5)
  silkscreen extent -79,-75 79,53

## Part data
C1 C2 C3 C4 C5 C6 C7 C8 C9 C10 C11 C12 C13 C14 C15 C16 C17 C18 C19 C20 C21 C22 C23 C24 C25 C26 C27 C28 C29 C30 C31 C32 C33 C34 C35 C36 C37 C38 C39 C40 C41 C42 C43 C44 C45 C46 C47 C48 C49 C50 C51 C52 C53 C54 C55 C56 C57 C58 C59 C60 C61 C62 C63 C64 C65 C66 C67 C68 C69 C70 C71 C72 C73: "贴片电容"
D1 D2 D3 D4 D5 D6 D11: library part "Diode 1N4148", "High Conductance Fast Diode"
F1 F2 F3 F4: "Fuse"
JTAG1: "Header, 7-Pin, Dual row"
LS1 LS2: "Electrical Bell"
MCU_CFG1: "Header, 5-Pin"
P5: library part "Header 5X2", "Header, 5-Pin, Dual row"
PMOD1 PMOD2 PMOD3: "Header, 6-Pin, Dual row"
PMOD4: "Header, 6-Pin"
Q1 Q2: "NPN Bipolar Transistor"
R1 R3 R5 R7 R8 R9 R10 R11 R12 R13 R14 R15 R16 R17 R18 R19 R20 R21 R22 R23 R25 R26 R27 R28 R29 R30 R31 R32 R33 R34 R35 R36 R37 R38 R39 R40 R41 R42 R43 R44 R45 R53 R54 R55 R56: "贴片电阻"
R2 R4 R6: library part Res, "贴片电阻"
R24 R52: "Resistor"
S1 S2 S4 S5: "Switch"
S3 S6: "DIP Switch, 2 Position, SPST"
SIG_TEST1: "Header, 24-Pin, Dual row"
U3: library part TPS701
U4: library part TLV712
XTAL1: library part 有源晶体
Y1 Y2: library part XTAL1
Y3: library part XTAL, "晶体振荡器"

## Via types
v1: diameter 0.45, hole 0.2, Top Layer to Bottom Layer, tented both sides, 280 vias
v2: diameter 0.61, hole 0.33, Top Layer to Bottom Layer, tented both sides, 40 vias
v3: diameter 0.403, hole 0.2, Top Layer to Bottom Layer, tented both sides, 15 vias
v4: diameter 0.5, hole 0.2, Top Layer to Bottom Layer, tented both sides, 12 vias
v5: diameter 0.864, hole 0.508, Top Layer to Bottom Layer, tented both sides, 11 vias
v6: diameter 0.864, hole 0.356, Top Layer to Bottom Layer, tented both sides, 1 vias
v7: diameter 0.864, hole 0.381, Top Layer to Bottom Layer, tented both sides, 1 vias

## Nets (pads, with @x,y where several pads share a name; then routed paths per layer and width w, separated by ;. In a path a pad name is that pad's centre, name@x,y a point inside that pad or via, vN(x,y) a via of type N, cw(c..) or ccw(c..) an arc to the next point about the centre after c; other vN are vias at no path point)
1V0: C4.1 C6.1 C7.1 C10.1 C11.1 C12.1 C15.1 C16.1 C17.1 C19.1 C20.1 C22.1 F2.1 U1.E10 U1.F7 U1.F9 U1.F11 U1.G6 U1.H9 U1.J6 U1.K9 U1.L8 | length 96.6
  Top Layer w0.152: U1.E10@53.218,49.321 ccw(c52.964,49.575) 53.323,49.575 ccw(c53.682,49.575) 53.428,49.321 ccw(c53.682,49.575) 53.682,49.216 ccw(c53.682,48.857) U1.E10@53.428,49.111 ; U1.F11@53.218,50.525 cw(c52.964,50.271) 53.323,50.271 cw(c53.682,50.271) U1.F11@53.428,50.525 ; U1.E10@53.323,49.365 ccw(c53.323,49.724) 53.577,49.47 ccw(c53.831,49.216) U1.E10@53.472,49.216 ; 53.323,49.936 53.323,49.89 ; U1.F11@53.323,50.63 53.323,49.89 ; U1.F9@54.588,49.216 cw(c54.229,49.216) 54.483,48.962 cw(c54.737,48.708) U1.F9@54.737,49.067 ; U1.F9@54.632,49.321 cw(c54.378,49.575) 54.378,49.216 cw(c54.378,48.857) 54.632,49.111 cw(c54.378,48.857) 54.737,48.857 cw(c55.096,48.857) U1.F9@54.842,49.111 ; U1.F7@56.046,47.697 ccw(c55.792,47.443) 55.792,47.802 ccw(c55.792,48.161) U1.F7@56.046,47.907 ; U1.H9@56.046,50.736 ccw(c55.792,50.99) 56.151,50.99 ccw(c56.51,50.99) U1.H9@56.256,50.736 ; U1.H9@56.151,50.63 56.151,51.338 56.858,52.045 U1.K9@57.565,52.045 58.273,52.045 ; U1.F7@56.256,47.697 cw(c56.51,47.443) 56.51,47.802 cw(c56.51,48.161) U1.F7@56.256,47.907 ; v1@56.753,47.697 ccw(c56.499,47.443) 56.499,47.802 ccw(c56.499,48.161) v1@56.753,47.907 ; v1@56.964,47.697 cw(c57.218,47.443) 57.218,47.802 cw(c57.218,48.161) v1@56.964,47.907 ; U1.G6@57.46,47.697 ccw(c57.206,47.443) 57.206,47.802 ccw(c57.206,48.161) U1.G6@57.46,47.907 ; U1.K9@57.46,51.939 ccw(c57.206,51.685) 57.206,52.045 ccw(c57.206,52.404) U1.K9@57.46,52.15 ; U1.G6@57.671,47.697 cw(c57.925,47.443) 57.925,47.802 cw(c57.925,48.161) U1.G6@57.671,47.907 ; U1.K9@57.671,51.939 cw(c57.925,51.685) 57.925,52.045 cw(c57.925,52.404) U1.K9@57.671,52.15 ; v1@58.831,51.337 ccw(c58.472,51.337) 58.726,51.592 ccw(c58.98,51.846) v1@58.98,51.486 ; U1.L8@58.831,52.045 cw(c58.472,52.045) 58.726,51.791 cw(c58.98,51.537) U1.L8@58.98,51.896 ; U1.J6@58.874,49.111 cw(c58.62,48.857) 58.98,48.857 cw(c59.339,48.857) U1.J6@59.085,49.111 ; v1@58.874,51.443 ccw(c58.62,51.697) 58.98,51.697 ccw(c59.339,51.697) v1@59.085,51.443 ; U1.L8@58.874,52.15 cw(c58.62,52.404) 58.62,52.045 cw(c58.62,51.685) 58.874,51.939 cw(c58.62,51.685) 58.98,51.685 cw(c59.339,51.685) U1.L8@59.085,51.939 ; U1.J6@58.98,49.216 58.98,48.502 58.279,47.802 U1.G6@57.565,47.802 v1(56.858,47.802) U1.F7@56.151,47.802 55.411,47.802 54.737,48.476 ; U1.E10@53.323,49.216 53.997,49.216 ; U1.E10@53.323,49.216 53.66,49.553 ; U1.E10@53.323,49.216 53.323,49.89 ; 53.323,49.89 53.66,49.553 ; 53.66,49.553 53.997,49.216 ; 53.997,49.216 54.013,49.216 ; 53.997,49.216 54.013,49.2 ; 54.013,49.2 54.356,48.857 ; 54.013,49.2 54.013,49.216 ; 54.013,49.216 U1.F9@54.737,49.216 ; 54.356,48.857 54.737,48.476 ; 54.356,48.857 54.378,48.857 U1.F9@54.737,49.216 ; 54.737,48.476 U1.F9@54.737,49.216 ; 58.273,52.045 58.626,51.691 ; 58.273,52.045 U1.L8@58.98,52.045 ; 58.626,51.691 v1(58.98,51.337) U1.L8@58.98,52.045 ; 58.626,51.691 U1.L8@58.98,52.045
  Top Layer w0.254: F2.1@31.191,35.204 34.684,35.204 37.973,38.494 49.212,38.494 cw(c49.212,38.816) C6.1@48.892,38.775 ; F2.1@31.473,34.923 cw(c32.152,34.244) 32.152,35.204 cw(c32.152,36.165) F2.1@31.473,35.486 ; 47.272,38.494 ccw(c47.272,40.053) v6@48.375,38.951 ; 47.565,38.494 cw(c47.565,37.057) C6.1@48.581,38.073 ; 47.885,38.494 ccw(c47.885,39.44) C6.1@48.554,38.771 ; 48.178,38.494 cw(c48.178,37.67) C6.1@48.761,38.252 ; v6@48.238,38.494 ccw(c48.238,38.978) C6.1@48.581,38.636
  Bottom Layer w0.152: v6@48.339,38.986 ccw(c47.732,39.593) 48.59,39.593 ccw(c49.449,39.593) v6@48.842,38.986 ; v6@48.447,38.879 ccw(c48.1,39.226) 48.59,39.226 ccw(c49.081,39.226) v6@48.734,38.879 ; C11.1@48.54,38.624 ccw(c48.417,38.746) C11.1@48.59,38.746 ; C16.1@48.54,39.224 cw(c48.417,39.101) C16.1@48.59,39.101 ; C16.1@48.54,39.469 ccw(c48.417,39.591) C16.1@48.59,39.591 ; v6(48.59,38.735) 48.59,40.03 53.785,45.225 53.785,46.419 54.889,47.523 56.689,47.523 C22.1@56.782,47.43 ; v6@48.59,38.752 cw(c49.257,38.752) C16.1@48.785,39.224 ; v6@48.59,39.095 ccw(c49.257,39.095) C11.1@48.785,38.624 ; 48.59,39.941 ccw(c49.257,39.941) C16.1@48.785,39.469 ; 56.436,47.523 cw(c56.436,47.015) C22.1@56.795,47.374 ; C20.1@58.81,49.597 ccw(c58.4,50.007) 58.98,50.007 ; v1@58.874,51.232 cw(c58.62,50.978) 58.98,50.978 cw(c59.339,50.978) v1@59.085,51.232 ; C20.1@58.905,49.515 58.98,49.59 v1(58.98,51.337) ; 58.98,49.781 ccw(c59.239,49.781) C20.1@59.056,49.597
  Bottom Layer w0.203: C22.1@56.782,47.43 56.82,47.43 C20.1@58.905,49.515 ; C22.1@56.81,47.538 ccw(c56.81,47.821) 57.01,47.621 ; v1@56.858,47.722 ccw(c56.858,48.334) C15.1@57.291,47.901 ; v1@56.858,47.925 ccw(c56.858,49.027) 57.638,48.248 ; C22.1@56.958,47.389 cw(c57.391,47.389) 57.085,47.696 ; 57.018,47.629 cw(c57.341,47.306) C15.1@57.341,47.762 ; 57.116,47.726 ccw(c56.932,47.911) C15.1@57.192,47.911 ; C15.1@57.341,48.059 ccw(c57.341,48.32) 57.525,48.135 ; C15.1@57.489,47.911 cw(c57.945,47.911) 57.623,48.233 ; 57.533,48.143 cw(c57.871,47.805) C10.1@57.871,48.284 ; 57.653,48.264 ccw(c57.485,48.432) C10.1@57.723,48.432 ; C10.1@57.871,48.58 ccw(c57.871,48.818) 58.039,48.65 ; C10.1@58.02,48.432 cw(c58.499,48.432) 58.16,48.771 ; 58.047,48.658 cw(c58.402,48.303) C19.1@58.402,48.805 ; 58.191,48.801 ccw(c58.039,48.953) C19.1@58.254,48.953 ; C19.1@58.402,49.102 ccw(c58.402,49.316) 58.554,49.164 ; C19.1@58.55,48.953 cw(c59.052,48.953) 58.697,49.308 ; 58.562,49.172 cw(c58.933,48.801) C20.1@58.933,49.326
  Bottom Layer w0.254: v6@48.375,38.519 cw(c47.559,37.704) C7.1@48.713,37.704 ; v6@48.529,39.034 ccw(c48.466,39.34) 48.769,39.259 ccw(c49.154,39.156) v6@48.834,38.917 ; C11.1@48.554,38.699 cw(c48.172,38.317) C11.1@48.713,38.317 ; C4.1@48.626,35.253 ccw(c48.416,35.463) 48.713,35.463 ccw(c49.009,35.463) C4.1@48.799,35.253 ; C12.1@48.626,35.918 cw(c48.416,35.708) 48.713,35.708 cw(c49.009,35.708) C12.1@48.799,35.918 ; C12.1@48.626,36.091 ccw(c48.416,36.301) 48.713,36.301 ccw(c49.009,36.301) C12.1@48.799,36.091 ; C17.1@48.626,36.756 cw(c48.416,36.546) 48.713,36.546 cw(c49.009,36.546) C17.1@48.799,36.756 ; C17.1@48.626,36.93 ccw(c48.416,37.14) 48.713,37.14 ccw(c49.009,37.14) C17.1@48.799,36.93 ; C7.1@48.626,37.569 cw(c48.416,37.359) 48.713,37.359 cw(c49.009,37.359) C7.1@48.799,37.569 ; C7.1@48.626,37.742 ccw(c48.416,37.952) 48.713,37.952 ccw(c49.009,37.952) C7.1@48.799,37.742 ; C11.1@48.626,38.414 cw(c48.416,38.204) 48.713,38.204 cw(c49.009,38.204) C11.1@48.799,38.414 ; C11.1@48.626,38.588 ccw(c48.416,38.798) 48.713,38.798 ccw(c49.009,38.798) C11.1@48.799,38.588 ; C16.1@48.626,39.259 cw(c48.416,39.049) 48.713,39.049 cw(c49.009,39.049) C16.1@48.799,39.259 ; C4.1@48.713,35.166 48.713,35.966 48.713,36.766 48.713,37.541 48.713,38.349 C16.1@48.713,39.156 ; C11.1@48.713,38.294 cw(c49.031,38.294) C11.1@48.806,38.519
1V0_IN: C59.1 D3.1 F2.2 U4.5 | length 17.2
  Top Layer w0.203: U4.5@28.067,27.791 U4.5@28.086,27.772 ; C59.1@29.836,27.772 C59.1@30.048,27.56
  Top Layer w0.254: F2.2@27.76,34.573 cw(c27.081,33.894) 28.041,33.894 cw(c29.002,33.894) F2.2@28.323,34.573 ; D3.1@27.786,29.468 cw(c27.106,28.788) 28.067,28.788 cw(c29.028,28.788) D3.1@28.349,29.468 ; D3.1@27.786,30.73 ccw(c27.169,31.348) 28.041,31.348 ; U4.5@27.964,27.895 ccw(c27.713,28.145) 28.067,28.145 ; 28.041,31.472 ccw(c29.09,31.472) D3.1@28.349,30.73 ; F2.2@28.041,35.204 28.041,30.125 D3.1@28.067,30.099 28.067,27.791 29.818,27.791 C59.1@29.836,27.772 ; 28.067,28.235 ccw(c28.549,28.235) U4.5@28.208,27.895 ; U4.5@28.458,27.65 cw(c28.799,27.31) 28.799,27.791 ; U4.5@28.458,27.895 ccw(c28.708,28.145) 28.708,27.791 ; 28.782,27.791 cw(c28.782,26.345) C59.1@29.805,27.367 ; 29.396,27.791 cw(c29.396,26.958) C59.1@29.985,27.547
1V8: C5.1 C8.1 C13.1 C18.1 C21.1 C23.1 F4.1 FB1.1 U1.F8 U1.G10 U1.J10 U1.K11 U1.L10 | length 60.3
  Top Layer w0.152: v7@46.827,37.341 cw(c46.22,36.734) 47.079,36.734 cw(c47.937,36.734) v7@47.33,37.341 ; v7@46.935,37.448 cw(c46.588,37.101) 47.079,37.101 cw(c47.569,37.101) v7@47.223,37.448 ; v7(47.079,37.592) 47.079,33.769 47.18,33.668 48.997,33.668 49.314,33.35 F4.1@49.314,31.255 ; F4.1@48.997,31.572 ccw(c48.231,32.338) 49.314,32.338 ccw(c50.398,32.338) F4.1@49.631,31.572 ; F4.1@49.105,31.464 ccw(c48.599,31.97) 49.314,31.97 ccw(c50.03,31.97) F4.1@49.524,31.464 ; v1@54.632,50.028 ccw(c54.378,50.283) 54.737,50.283 ccw(c55.096,50.283) v1@54.842,50.028 ; U1.G10@54.632,50.525 cw(c54.378,50.271) 54.737,50.271 cw(c55.096,50.271) U1.G10@54.842,50.525 ; v1@54.737,49.774 cw(c54.737,49.476) 54.948,49.687 ; U1.G10@54.737,50.779 ccw(c54.737,51.138) 54.991,50.884 ccw(c55.245,50.63) U1.G10@54.886,50.63 ; v1@54.886,49.923 ccw(c55.305,49.923) 55.009,49.627 ; U1.F8@55.339,48.614 ccw(c55.085,48.868) 55.444,48.868 ccw(c55.803,48.868) U1.F8@55.549,48.614 ; U1.F8@55.444,48.509 55.444,49.191 54.737,49.898 v1(54.737,49.923) U1.G10@54.737,50.63 55.014,50.908 55.658,50.908 55.91,51.16 55.91,51.803 ; U1.J10@56.003,52.039 cw(c55.686,52.027) 55.91,51.803 ; U1.J10@56.146,51.896 ccw(c56.134,51.579) 55.91,51.803 ; U1.K11@56.151,53.459 U1.L10@57.565,53.459 57.565,52.676 57.175,52.286 56.393,52.286 ; U1.J10@56.157,52.193 ccw(c56.168,52.51) 56.392,52.286 ; U1.K11@56.256,53.354 cw(c56.51,53.1) 56.51,53.459 cw(c56.51,53.818) U1.K11@56.256,53.564 ; U1.J10@56.3,52.05 cw(c56.617,52.062) 56.392,52.286 ; U1.L10@57.46,53.564 cw(c57.206,53.818) 57.206,53.459 cw(c57.206,53.1) 57.46,53.354 cw(c57.206,53.1) 57.565,53.1 cw(c57.925,53.1) U1.L10@57.671,53.354 ; 55.91,51.803 56.393,52.286
  Bottom Layer w0.152: v7@46.827,37.843 ccw(c46.19,38.481) 47.092,38.481 ; v7@46.935,37.736 ccw(c46.558,38.113) 47.092,38.113 ; v7@47.092,37.91 47.092,40.399 54.067,47.375 54.089,47.375 54.34,47.625 54.34,49.385 52.972,50.753 ; 47.092,38.052 ccw(c47.539,38.052) v7@47.223,37.736 ; 47.092,38.42 ccw(c47.907,38.42) v7@47.33,37.843 ; C23.1@52.093,50.036 ccw(c52.093,50.425) 52.368,50.15 ; C23.1@52.106,49.875 52.106,49.888 C21.1@52.667,50.449 ; C23.1@52.267,49.862 cw(c52.717,49.862) 52.399,50.181 ; C21.1@52.504,50.459 cw(c52.084,50.459) 52.381,50.162 cw(c52.678,49.866) C21.1@52.678,50.285 ; C21.1@52.665,50.452 C21.1@52.667,50.449 ; C18.1@53.262,51.217 ccw(c53.262,51.637) 53.558,51.34 ccw(c53.855,51.043) C18.1@53.436,51.043 ; C13.1@53.659,51.615 cw(c53.24,51.615) 53.537,51.318 cw(c53.833,51.021) C13.1@53.833,51.441 ; C13.1@53.833,51.789 ccw(c53.833,52.208) 54.13,51.912 ccw(c54.427,51.615) C13.1@54.007,51.615 ; C8.1@54.256,52.212 cw(c53.837,52.212) 54.133,51.915 cw(c54.43,51.618) C8.1@54.43,52.038 ; C8.1@54.394,52.07 cw(c53.506,51.181) C5.1@54.763,51.181 ; C8.1@54.487,52.176 ccw(c54.968,52.176) 54.628,51.836 ; C8.1@54.639,52.176 ccw(c55.488,52.176) 54.888,51.576 ; 54.655,51.81 cw(c54.026,51.181) C5.1@54.915,51.181 ; C5.1@54.863,51.058 cw(c54.567,50.761) 54.986,50.761 cw(c55.406,50.761) C5.1@55.109,51.058 ; FB1.1@54.894,50.254 ccw(c54.669,50.478) 54.986,50.478 ; C5.1@54.901,51.333 ccw(c54.82,51.478) 54.986,51.478 ; 54.915,51.549 cw(c54.546,51.181) C5.1@55.067,51.181 ; 54.986,50.623 ccw(c55.509,50.623) FB1.1@55.139,50.254 ; FB1.1@55.016,50.081 54.986,50.111 54.986,51.478 ; C5.1@55.071,51.333 cw(c55.153,51.478) 54.986,51.478 ; C21.1@52.667,50.449 52.972,50.753 ; 52.972,50.753 54.341,52.123 54.986,51.478
1V8_IN: C61.1 D4.1 F4.2 U3.12 U3.13 U3.14 | length 28.9
  Top Layer w0.152: D4.1@41.047,25.133 44.45,25.133 44.69,25.373 44.69,28.107 ; D4.1@41.256,24.924 cw(c41.762,24.418) 41.762,25.133 cw(c41.762,25.849) D4.1@41.256,25.343 ; D4.1@41.364,24.816 cw(c42.13,24.05) 42.13,25.133 cw(c42.13,26.217) D4.1@41.364,25.451 ; U3.12@42.271,27.875 44.69,27.875 ; U3.13@42.271,28.525 44.272,28.525 ; U3.14@42.271,29.175 43.622,29.175 44.272,28.525 ; U3.12@43.016,27.805 cw(c43.184,27.636) 43.184,27.875 cw(c43.184,28.113) U3.12@43.016,27.945 ; U3.13@43.016,28.455 cw(c43.184,28.286) 43.184,28.525 cw(c43.184,28.763) U3.13@43.016,28.595 ; U3.14@43.016,29.105 cw(c43.184,28.936) 43.184,29.175 cw(c43.184,29.413) U3.14@43.016,29.245 ; C61.1@45.505,27.878 ccw(c44.952,27.325) 44.952,28.107 ccw(c44.952,28.888) C61.1@45.505,28.336 ; C61.1@45.612,27.985 ccw(c45.32,27.693) 45.32,28.107 ccw(c45.32,28.52) C61.1@45.612,28.228 ; C61.1@45.955,27.985 cw(c46.243,27.697) 46.243,28.105 ; C61.1@45.955,28.228 ccw(c46.251,28.524) 46.251,28.105 ; C61.1@46.062,27.878 cw(c46.611,27.329) 46.611,28.105 ; C61.1@46.062,28.336 ccw(c46.619,28.892) 46.619,28.105 ; F4.2@48.647,27.788 ccw(c47.881,27.021) 47.881,28.105 ccw(c47.881,29.188) F4.2@48.647,28.422 ; F4.2@48.755,27.895 ccw(c48.249,27.389) 48.249,28.105 ccw(c48.249,28.82) F4.2@48.755,28.314 ; F4.2@49.314,28.105 45.785,28.105 C61.1@45.784,28.107 44.69,28.107 ; 44.272,28.525 44.69,28.107